# Allegro board pc049a_toplevel_28.brd
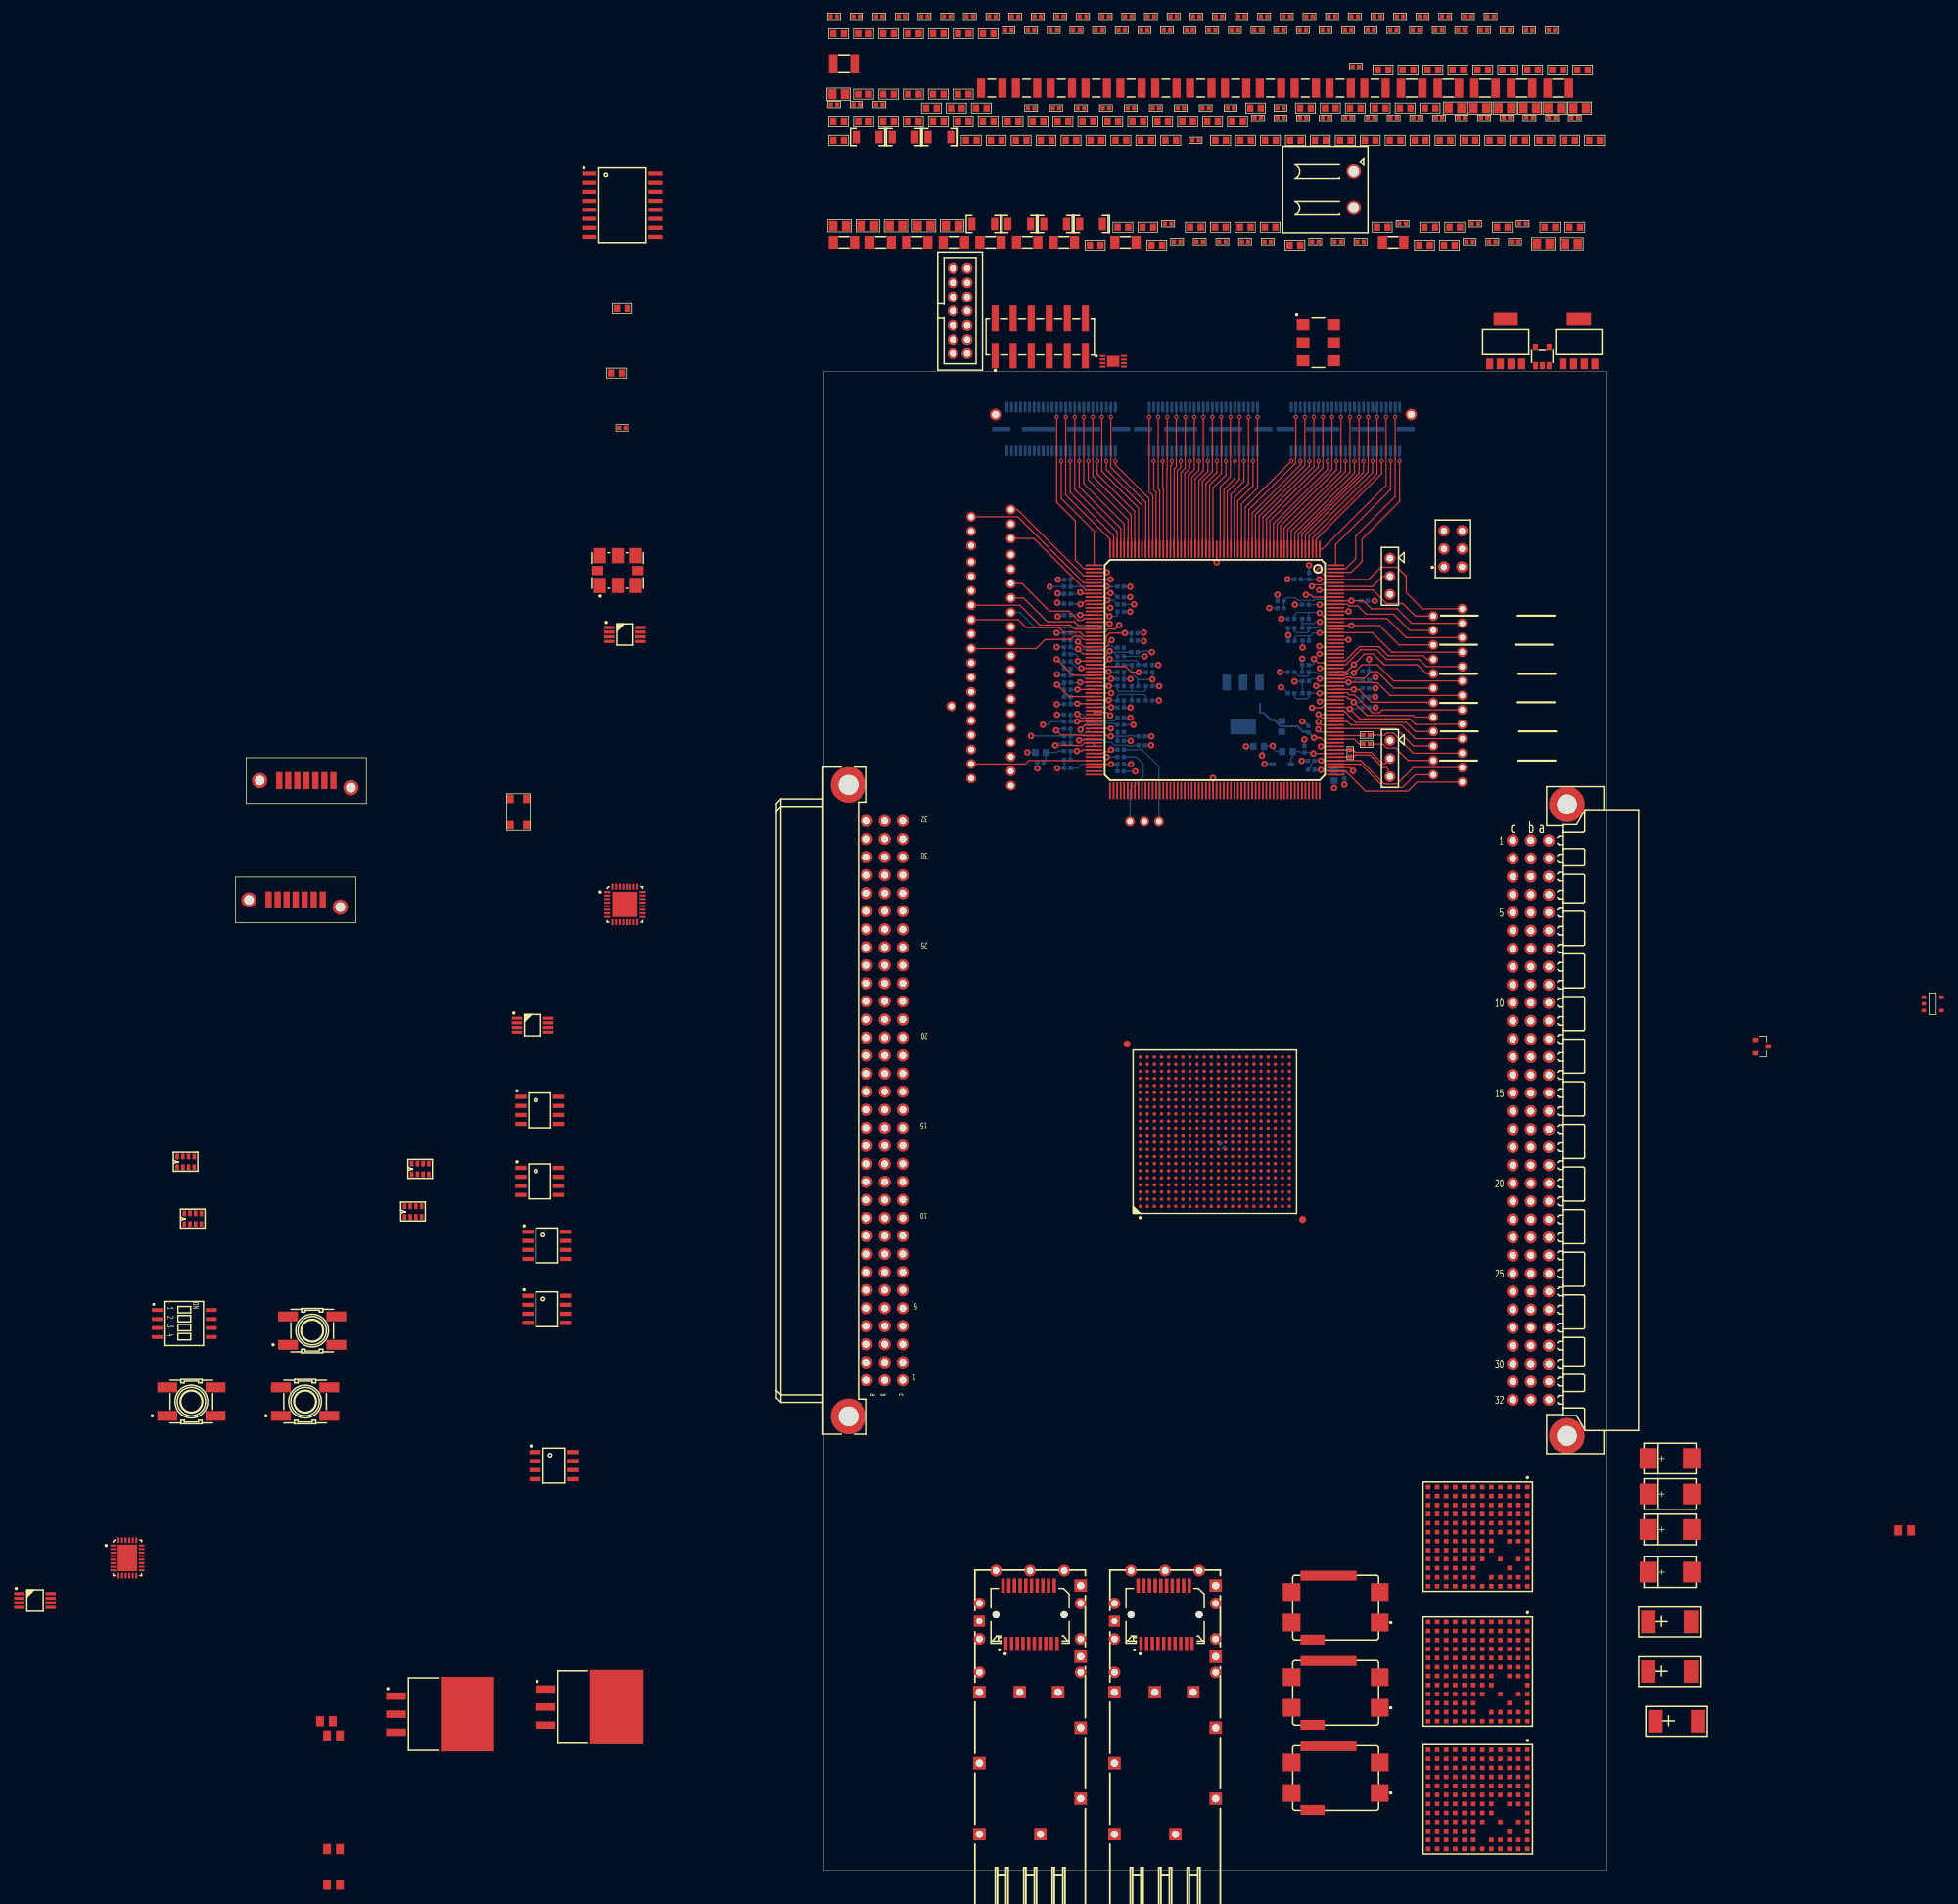
[diagram p0: board, top side]
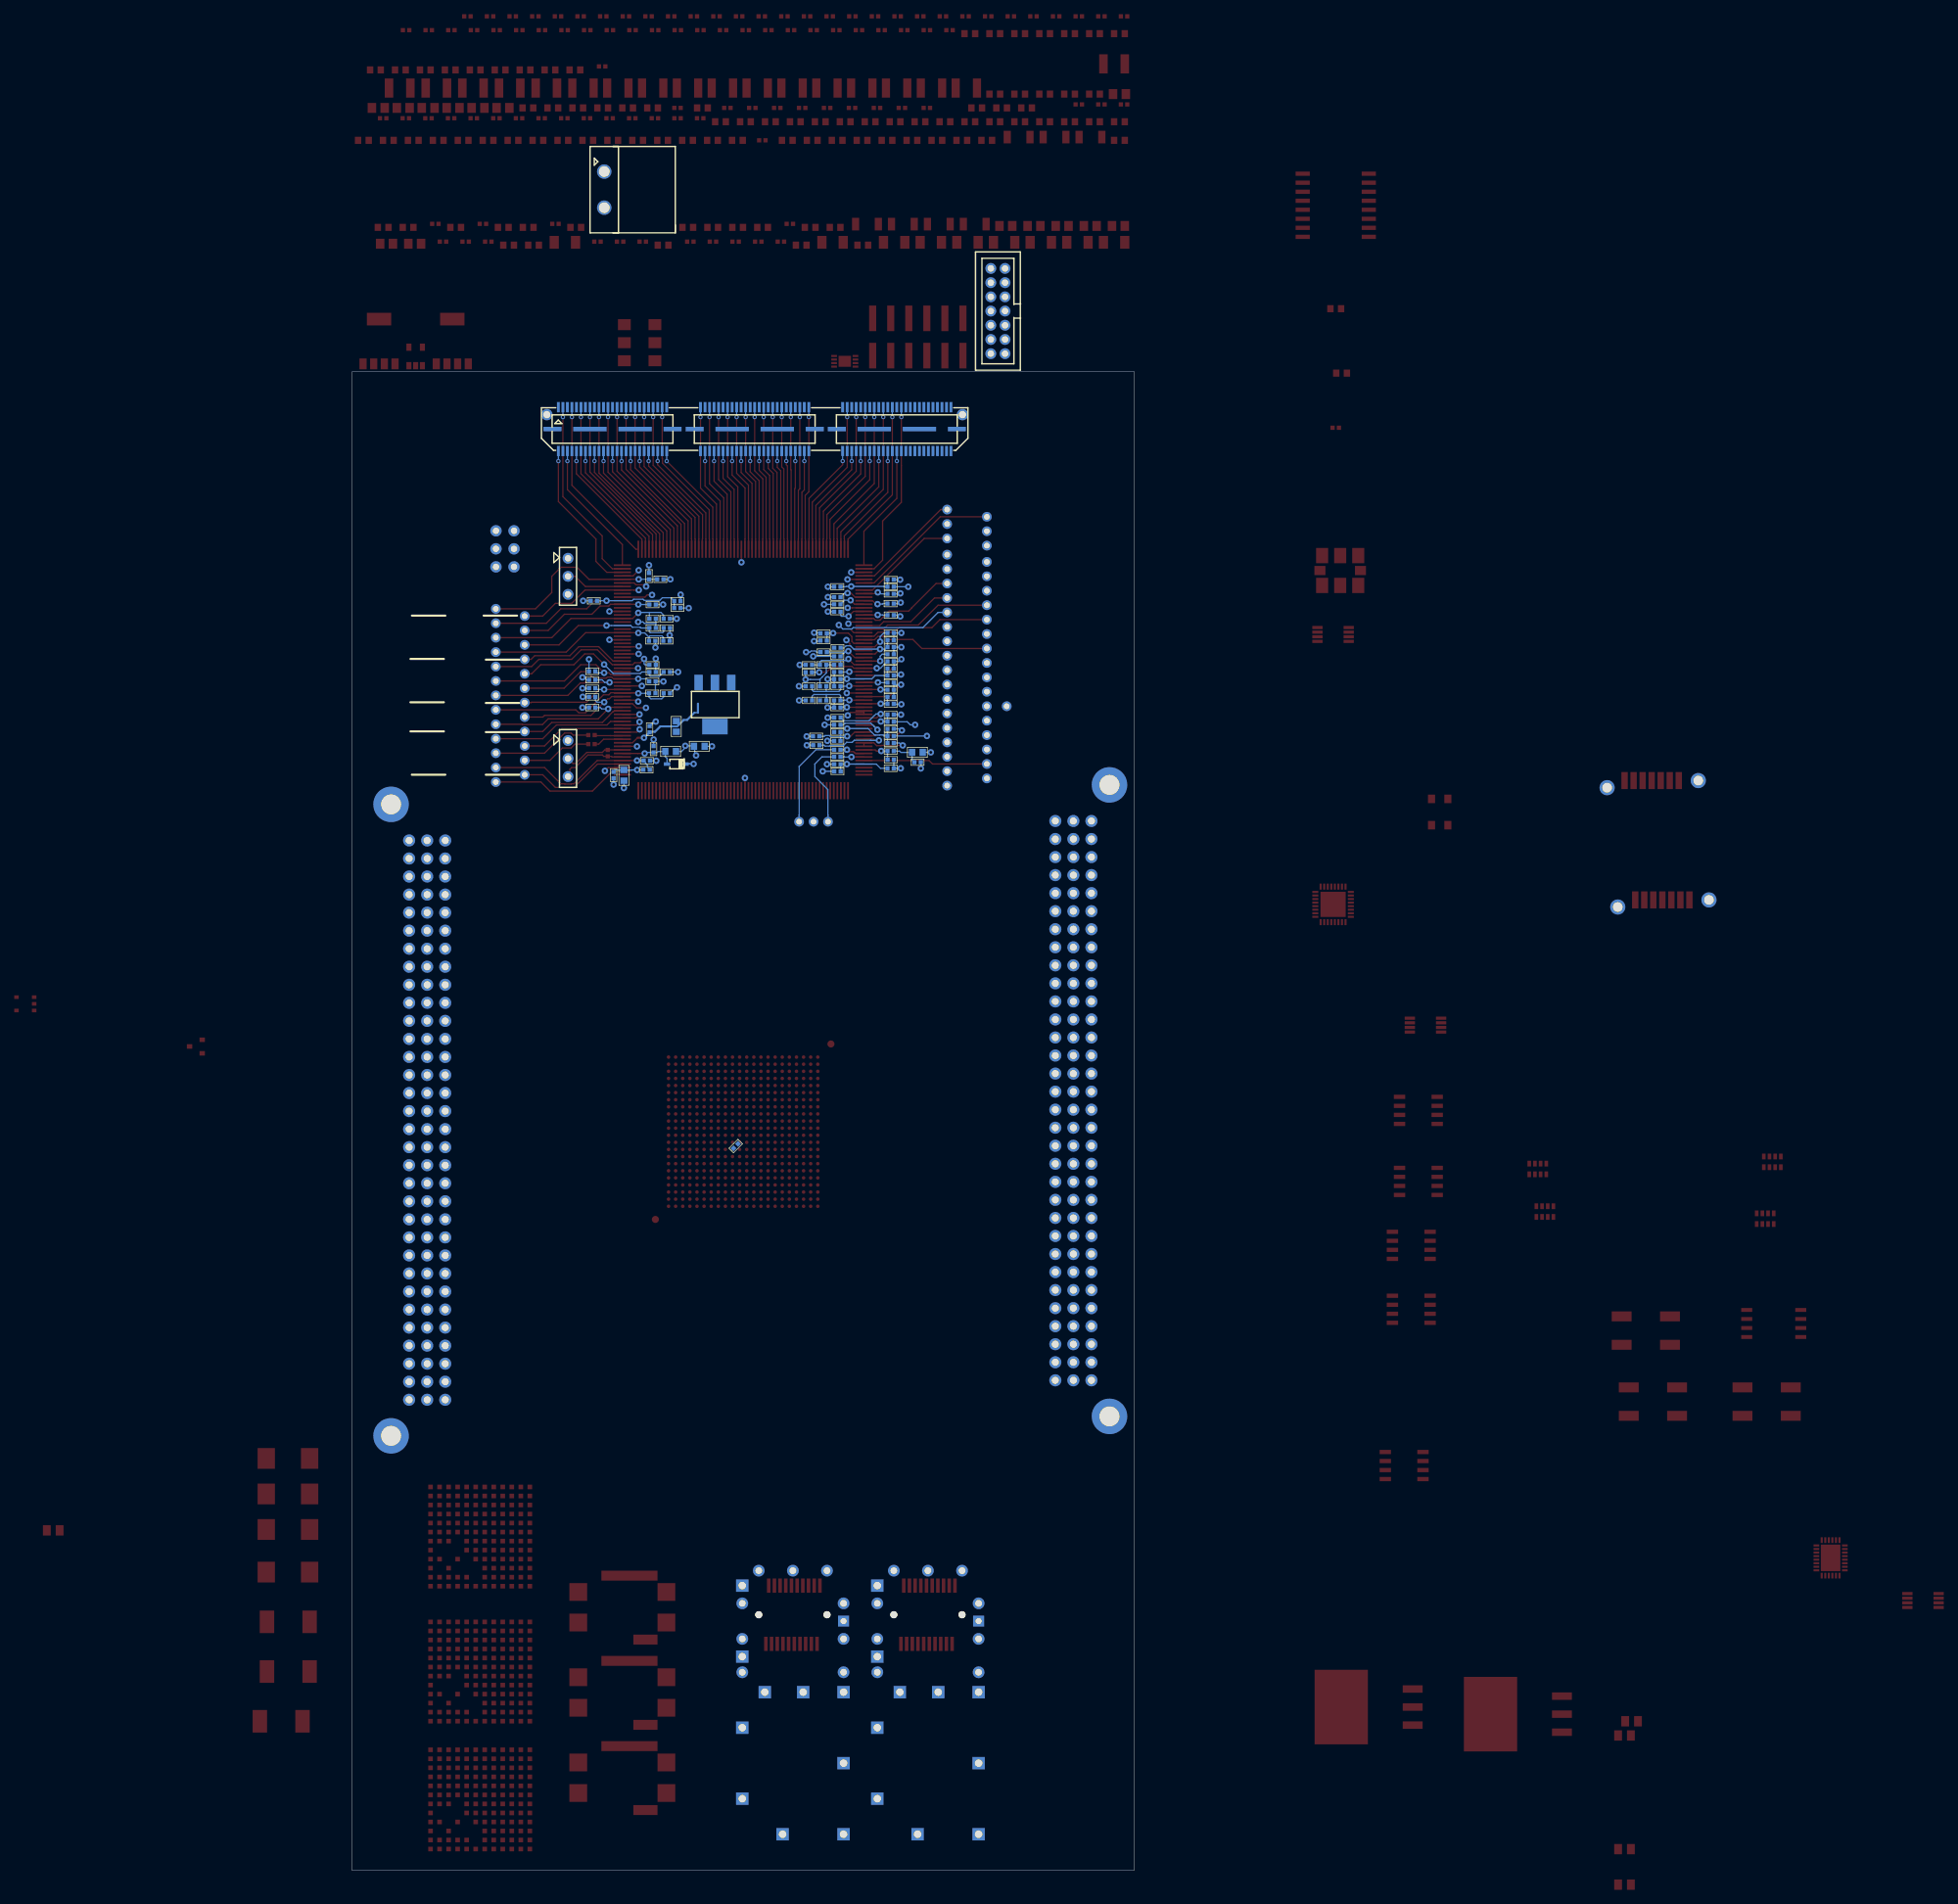
[diagram p1: board, bottom side, seen from below]

Outline 110 x 211 mm; copper layers: TOP, L2, L3, L4, L5, BOTTOM. Coordinates in mm from the lower left corner of the outline.
Outline path: 0,211 110,211 110,0 0,0 0,211

## Design rules (mm)
net group OR: nets OR<0> OR<1>
net group SATA_RXN: nets SATA_MRX_N SATA_SRX_N
net group SATA_RXP: nets SATA_MRX_P SATA_SRX_P
net group SATA_TXN: nets SATA_MTX_N SATA_STX_N
net group SATA_TXP: nets SATA_MTX_P SATA_STX_P
net group SFP_LOS: nets SFP0_LOS SFP1_LOS
net group SFP_MOD_DEF0: nets SFP0_MOD_DEF0 SFP1_MOD_DEF0
net group SFP_MOD_DEF1: nets SFP0_MOD_DEF1 SFP1_MOD_DEF1
net group SFP_MODE_DEF2: nets SFP0_MOD_DEF2 SFP1_MOD_DEF2
net group SFP_RATE_SELECT: nets SFP0_RATE_SELECT SFP1_RATE_SELECT
net group SFP_RXN: nets SFP0_RX_N SFP1_RX_N
net group SFP_RXP: nets SFP0_RX_P SFP1_RX_P
net group SFP_TX_DISABLE: nets SFP0_TX_DISABLE SFP1_TX_DISABLE
net group SFP_TX_FAULT: nets SFP0_TX_FAULT SFP1_TX_FAULT
net group SFP_TXN: nets SFP0_TX_N SFP1_TX_N
net group SFP_TXP: nets SFP0_TX_P SFP1_TX_P
net group ANALOG_TO_MAROC: nets ANALOG_TO_MAROC<0> ANALOG_TO_MAROC<1> ANALOG_TO_MAROC<2> ANALOG_TO_MAROC<3> ANALOG_TO_MAROC<4> ANALOG_TO_MAROC<5> ANALOG_TO_MAROC<6> ANALOG_TO_MAROC<7> ANALOG_TO_MAROC<8> ANALOG_TO_MAROC<9> ANALOG_TO_MAROC<10> ANALOG_TO_MAROC<11> ANALOG_TO_MAROC<12> ANALOG_TO_MAROC<13> ANALOG_TO_MAROC<14> ANALOG_TO_MAROC<15> ANALOG_TO_MAROC<16> ANALOG_TO_MAROC<17> ANALOG_TO_MAROC<18> ANALOG_TO_MAROC<19> ANALOG_TO_MAROC<20> ANALOG_TO_MAROC<21> ANALOG_TO_MAROC<22> ANALOG_TO_MAROC<23> ANALOG_TO_MAROC<24> ANALOG_TO_MAROC<25> ANALOG_TO_MAROC<26> ANALOG_TO_MAROC<27> ANALOG_TO_MAROC<28> ANALOG_TO_MAROC<29> ANALOG_TO_MAROC<30> ANALOG_TO_MAROC<31> ANALOG_TO_MAROC<32> ANALOG_TO_MAROC<33> ANALOG_TO_MAROC<34> ANALOG_TO_MAROC<35> ANALOG_TO_MAROC<36> ANALOG_TO_MAROC<37> ANALOG_TO_MAROC<38> ANALOG_TO_MAROC<39> ANALOG_TO_MAROC<40> ANALOG_TO_MAROC<41> ANALOG_TO_MAROC<42> ANALOG_TO_MAROC<43> ANALOG_TO_MAROC<44> ANALOG_TO_MAROC<45> ANALOG_TO_MAROC<46> ANALOG_TO_MAROC<47> ANALOG_TO_MAROC<48> ANALOG_TO_MAROC<49> ANALOG_TO_MAROC<50> ANALOG_TO_MAROC<51> ANALOG_TO_MAROC<52> ANALOG_TO_MAROC<53> ANALOG_TO_MAROC<54> ANALOG_TO_MAROC<55> ANALOG_TO_MAROC<56> ANALOG_TO_MAROC<57> ANALOG_TO_MAROC<58> ANALOG_TO_MAROC<59> ANALOG_TO_MAROC<60> ANALOG_TO_MAROC<61> ANALOG_TO_MAROC<62> ANALOG_TO_MAROC<63>
net group DIG_CTEST: nets DIG_CTEST<0> DIG_CTEST<1> DIG_CTEST<2> DIG_CTEST<3> DIG_CTEST<4> DIG_CTEST<5>
net group DIP_SWITCH: nets DIP_SWITCH<0> DIP_SWITCH<1> DIP_SWITCH<2> DIP_SWITCH<3>
net group FPGA_GPIO: nets FPGA_GPIO<0> FPGA_GPIO<1> FPGA_GPIO<2> FPGA_GPIO<3> FPGA_GPIO<4> FPGA_GPIO<5> FPGA_GPIO<6> FPGA_GPIO<7>
net group FPGA_LEDS: nets FPGA_LEDS<0> FPGA_LEDS<1> FPGA_LEDS<2> FPGA_LEDS<3> FPGA_LEDS<4>
net group LVDS_DLEFT_N: nets LVDS_DLEFT_N<0> LVDS_DLEFT_N<1> LVDS_DLEFT_N<2> LVDS_DLEFT_N<3> LVDS_DLEFT_N<4> LVDS_DLEFT_N<5> LVDS_DLEFT_N<6> LVDS_DLEFT_N<7> LVDS_DLEFT_N<8> LVDS_DLEFT_N<9> LVDS_DLEFT_N<10> LVDS_DLEFT_N<11> LVDS_DLEFT_N<12> LVDS_DLEFT_N<13> LVDS_DLEFT_N<14> LVDS_DLEFT_N<15>
net group LVDS_DLEFT_P: nets LVDS_DLEFT_P<0> LVDS_DLEFT_P<1> LVDS_DLEFT_P<2> LVDS_DLEFT_P<3> LVDS_DLEFT_P<4> LVDS_DLEFT_P<5> LVDS_DLEFT_P<6> LVDS_DLEFT_P<7> LVDS_DLEFT_P<8> LVDS_DLEFT_P<9> LVDS_DLEFT_P<10> LVDS_DLEFT_P<11> LVDS_DLEFT_P<12> LVDS_DLEFT_P<13> LVDS_DLEFT_P<14> LVDS_DLEFT_P<15>
net group LVDS_DRIGHT_N: nets LVDS_DRIGHT_N<0> LVDS_DRIGHT_N<1> LVDS_DRIGHT_N<2> LVDS_DRIGHT_N<3> LVDS_DRIGHT_N<4> LVDS_DRIGHT_N<5> LVDS_DRIGHT_N<6> LVDS_DRIGHT_N<7> LVDS_DRIGHT_N<8> LVDS_DRIGHT_N<9> LVDS_DRIGHT_N<10> LVDS_DRIGHT_N<11> LVDS_DRIGHT_N<12> LVDS_DRIGHT_N<13> LVDS_DRIGHT_N<14> LVDS_DRIGHT_N<15>
net group LVDS_DRIGHT_P: nets LVDS_DRIGHT_P<0> LVDS_DRIGHT_P<1> LVDS_DRIGHT_P<2> LVDS_DRIGHT_P<3> LVDS_DRIGHT_P<4> LVDS_DRIGHT_P<5> LVDS_DRIGHT_P<6> LVDS_DRIGHT_P<7> LVDS_DRIGHT_P<8> LVDS_DRIGHT_P<9> LVDS_DRIGHT_P<10> LVDS_DRIGHT_P<11> LVDS_DRIGHT_P<12> LVDS_DRIGHT_P<13> LVDS_DRIGHT_P<14> LVDS_DRIGHT_P<15>
net group SUM: nets SUM<1>_1 SUM<2>_1 SUM<3>_1 SUM<4>_1 SUM<5>_1 SUM<6>_1 SUM<7>_1 SUM<8>_1
net group TRIG: nets TRIG<0> TRIG<1> TRIG<2> TRIG<3> TRIG<4> TRIG<5> TRIG<6> TRIG<7> TRIG<8> TRIG<9> TRIG<10> TRIG<11> TRIG<12> TRIG<13> TRIG<14> TRIG<15> TRIG<16> TRIG<17> TRIG<18> TRIG<19> TRIG<20> TRIG<21> TRIG<22> TRIG<23> TRIG<24> TRIG<25> TRIG<26> TRIG<27> TRIG<28> TRIG<29> TRIG<30> TRIG<31> TRIG<32> TRIG<33> TRIG<34> TRIG<35> TRIG<36> TRIG<37> TRIG<38> TRIG<39> TRIG<40> TRIG<41> TRIG<42> TRIG<43> TRIG<44> TRIG<45> TRIG<46> TRIG<47> TRIG<48> TRIG<49> TRIG<50> TRIG<51> TRIG<52> TRIG<53> TRIG<54> TRIG<55> TRIG<56> TRIG<57> TRIG<58> TRIG<59> TRIG<60> TRIG<61> TRIG<62> TRIG<63>
net group UNNAMED_4_CDCM61004_I8_VCCOUT: nets P3V3A
net group UNNAMED_9_CAPCERSMDCL2_I82_B: nets UNNAMED_9_CAPCERSMDCL2_I82_B<0>
net group UNNAMED_9_LTM4606_I4_VOUT: nets P1V5
net group UNNAMED_9_LTM4606_I72_DRVCC: nets UNNAMED_9_LTM4606_I72_DRVCC<0>
net group UNNAMED_9_LTM4606_I72_VOUT: nets P3V8
net group UNNAMED_10_PC049AFPGA_I1_GND: nets GND_SIGNAL
net group UNNAMED_10_PC049AFPGA_I1_VCCAUX: nets P2V5
net group UNNAMED_10_PC049AFPGA_I1_VCCINT: nets P1V2
net group UNNAMED_10_PC049AFPGA_I1_VCCO3: nets P3V3
net group UNNAMED_11_CAPCERSMDCL2_I82_B: nets UNNAMED_11_CAPCERSMDCL2_I82_<0>
net group UNNAMED_11_LTM4606_I72_DRVCC: nets UNNAMED_11_LTM4606_I72_DRVCC<0>
net group UNNAMED_11_LTM4606_I72_PGND: nets DGND
net group UNNAMED_11_LTM4606_I72_VIN: nets P12V
net group UNNAMED_11_LTM4606_I72_VOUT: nets P4V6

## Placement (name value [footprint] x y rotation side)
C1  100nF  [C0402]  36.17 248.13 0 top
C1_1  100nF  [C0402]  68.56 156.22 180 bottom
C2  100nF  [C0402]  39.68 248.13 0 top
C2_1  100nF  [C0402]  34.24 156.37 0 bottom
C3  1uF  [C0402]  52.3 243.56 0 top
C3_1  100nF  [C0402]  43.67 171.51 180 bottom
C4  100nF  [C0402]  43.19 248.13 0 top
C4_1  100nF  [C0402]  68.25 182.21 270 bottom
C5  100nF  [C0402]  46.7 248.13 0 top
C5_1  100nF  [C0402]  67.75 176.21 0 bottom
C6  100nF  [C0402]  50.21 248.13 0 top
C6_1  100nF  [C0402]  34.25 181.71 0 bottom
C7  100nF  [C0402]  53.71 248.13 0 top
C7_1  100nF  [C0402]  67.75 174.91 0 bottom
C8  100nF  [C0402]  57.22 248.13 0 top
C8_1  100nF  [C0402]  34.25 180.71 0 bottom
C9  1uF  [C0402]  99.28 246.67 0 top
C9_1  100nF  [C0402]  43.68 173.13 180 bottom
C10  1uF  [C0402]  102.46 246.67 0 top
C10_1  100nF  [C0402]  67.8 173.1 0 bottom
C11  100nF  [C0402]  68.31 261.02 0 top
C11_1  100nF  [C0402]  34.25 165.21 0 bottom
C12  1uF  [C0402]  105.65 246.67 0 top
C12_1  100nF  [C0402]  67.75 168.71 0 bottom
C13  22uF  [C0603]  5.57 250.07 0 top
C13_1  100nF  [C0402]  34.25 170.21 0 bottom
C14  100nF  [C0402]  61.05 246.67 0 top
C14_1  100nF  [C0402]  34.25 162.71 0 bottom
C15  100nF  [C0402]  64.23 246.67 0 top
C15_1  100nF  [C0402]  34.25 160.71 0 bottom
C16  100nF  [C0402]  67.42 246.67 0 top
C16_1  100nF  [C0402]  67.79 165.72 0 bottom
C17  100nF  [C0402]  70.61 246.67 0 top
C17_1  100nF  [C0402]  34.25 158.71 0 bottom
C18  100nF  [C0402]  73.79 246.67 0 top
C18_1  100nF  [C0402]  34.25 179.71 0 bottom
C19  100nF  [C0402]  76.98 246.67 0 top
C19_1  100nF  [C0402]  41.75 164.71 180 bottom
C20  100nF  [C0402]  80.16 246.67 0 top
C20_1  100nF  [C0402]  34.25 176.71 0 bottom
C21  100nF  [C0402]  83.35 246.67 0 top
C21_1  100nF  [C0402]  41.75 166.71 180 bottom
C22  100nF  [C0402]  71.5 261.02 0 top
C22_1  100nF  [C0402]  34.25 171.21 0 bottom
C23  22uF  [C0603]  9.07 250.07 0 top
C23_1  100nF  [C0402]  67.77 167.39 0 bottom
C24  1uF  [C0402]  1.41 248.62 0 top
C24_1  100nF  [C0402]  34.25 173.21 0 bottom
C25  1uF  [C0402]  4.59 248.62 0 top
C25_1  100nF  [C0402]  76.25 163.71 180 bottom
C26  100nF  [C0402]  74.68 261.02 0 top
C26_1  100nF  [C0402]  34.25 166.21 0 bottom
C27  1uF  [C0402]  7.78 248.62 0 top
C27_1  100nF  [C0402]  41.75 168.71 180 bottom
C28  22uF  [C0603]  12.58 250.07 0 top
C28_1  100nF  [C0402]  41.75 177.21 180 bottom
C29  100nF  [C0402]  77.87 261.02 0 top
C29_1  100nF  [C0402]  41.75 169.71 0 bottom
C30  22uF  [C0603]  16.09 250.07 0 top
C30_1  100nF  [C0402]  41.75 161.27 180 bottom
C31  100nF  [C0603]  60.73 248.13 0 top
C31_1  100nF  [C0402]  76.25 168.81 180 bottom
C32  150uF  [C7343POL]  117 21 0 top
C32_1  100nF  [C0402]  41.75 179.26 180 bottom
C33  10uF  [CAPC3225X279N]  23.6 250.92 0 top
C33_1  100nF  [C0402]  41.75 167.71 180 bottom
C34  XX  [C0603]  31.25 243.56 0 top
C34_1  100nF  [C0402]  44.73 159.65 180 bottom
C35  10uF  [CAPC3225X279N]  28.51 250.92 0 top
C35_1  100nF  [C0402]  67.75 169.71 0 bottom
C36  10uF  [CAPC3225X279N]  33.41 250.92 0 top
C36_1  100nF  [C0402]  41.76 178.23 180 bottom
C37  10uF  [CAPC3225X279N]  38.31 250.92 0 top
C37_1  100nF  [C0402]  76.25 165.21 180 bottom
C38  47uF  [C1210]  82.7 250.92 0 top
C38_1  100nF  [C0402]  76.02 178.74 180 bottom
C39  47uF  [C1210]  87.85 250.92 0 top
C39_1  100nF  [C0402]  34.26 178.34 0 bottom
C40  220uF  [POSCAP_D3]  116 42 0 top
C40_1  100nF  [C0402]  34.25 174.21 0 bottom
C41  2.2uF  [C0603]  71.25 248.13 0 top
C41_1  100nF  [C0402]  41.75 163.71 180 bottom
C42  2.2uF  [C0603]  81.78 248.13 0 top
C42_1  100nF  [C0402]  76.24 167.6 180 bottom
C43  22uF  [C0805]  2.21 231.51 0 top
C43_1  100nF  [C0402]  67.75 178.21 0 bottom
C44  1nF  [C0402]  89.72 246.67 0 top
C44_1  100nF  [C0402]  41.74 155.74 180 bottom
C45  100nF  [C0402]  86.53 246.67 0 top
C45_1  100nF  [C0402]  41.74 162.29 180 bottom
C46  2.2uF  [C0603]  85.29 248.13 0 top
C46_1  100nF  [C0402]  76.24 166.42 180 bottom
C47  4.7uF  [C0603]  19.6 250.07 0 top
C47_1  100nF  [C0402]  34.25 167.21 0 bottom
C48  10uF  [C0603]  67.75 248.13 0 top
C48_1  10uF  [C0603]  64.41 161.05 90 bottom
C50  100nF  [C0402]  26.89 261.02 0 top
C50_1  100nF  [C0402]  67.61 157.84 270 bottom
C51  22uF  [C0805]  88.8 248.13 0 top
C51_1  100nF  [C0402]  68.17 160.66 270 bottom
C52  22uF  [C0805]  92.3 248.13 0 top
C52_1  10uF  [C0603]  71.78 154.17 90 bottom
C53  22uF  [C0805]  95.81 248.13 0 top
C53_1  10uF  [C0603]  30.49 157.4 0 bottom
C54  22uF  [C0805]  99.32 248.13 0 top
C54_1  10uF  [C0603]  61.17 158.25 0 bottom
C55  22uF  [C0805]  102.83 248.13 0 top
C56  100nF  [C0402]  30.08 261.02 0 top
C57  100nF  [C0402]  33.27 261.02 0 top
C58  100nF  [C0402]  36.45 261.02 0 top
C59  1uF  [C0402]  92.91 246.67 0 top
C60  100nF  [C0402]  29.16 248.13 0 top
C61  100nF  [C0402]  32.66 248.13 0 top
C62  100nF  [C0402]  39.64 261.02 0 top
C63  100nF  [C0402]  42.82 261.02 0 top
C64  100nF  [C0402]  46.01 261.02 0 top
C65  22uF  [C0805]  106.34 248.13 0 top
C66  100nF  [C0402]  49.2 261.02 0 top
C67  22uF  [C0805]  2.06 250.07 0 top
C68  100nF  [C0402]  52.38 261.02 0 top
C69  100nF  [C0402]  55.57 261.02 0 top
C70  100nF  [C0402]  58.75 261.02 0 top
C71  1uF  [C0402]  96.09 246.67 0 top
C72  100nF  [C0402]  61.94 261.02 0 top
C73  100nF  [C0402]  65.12 261.02 0 top
C74  22uF  [C0805]  101.22 229.01 0 top
C75  150uF  [C7343POL]  116 35 0 top
C76  10uF  [CAPC3225X279N]  62.83 250.92 0 top
C77  100nF  [C0402]  64.24 248.13 0 top
C78  10uF  [CAPC3225X279N]  67.73 250.92 0 top
C79  10uF  [CAPC3225X279N]  72.63 250.92 0 top
C80  10uF  [CAPC3225X279N]  77.54 250.92 0 top
C81  47uF  [C1210]  103.33 250.92 0 top
C82  47uF  [C1210]  2.81 254.32 0 top
C83  220uF  [POSCAP_D3]  116 53 0 top
C84  2.2uF  [C0603]  78.27 248.13 0 top
C85  220uF  [POSCAP_D3]  116 58 0 top
C86  150uF  [C7343POL]  116 28 0 top
C87  10uF  [CAPC3225X279N]  43.22 250.92 0 top
C88  XX  [C0603]  34.76 243.56 0 top
C89  10uF  [CAPC3225X279N]  48.12 250.92 0 top
C90  10uF  [CAPC3225X279N]  53.02 250.92 0 top
C91  10uF  [CAPC3225X279N]  57.92 250.92 0 top
C92  47uF  [C1210]  93.01 250.92 0 top
C93  47uF  [C1210]  98.17 250.92 0 top
C94  220uF  [POSCAP_D3]  116 48 0 top
C95  2.2uF  [C0603]  74.76 248.13 0 top
C96  100uF  [C1206]  23.44 229.21 0 top
C97  100uF  [C1206]  18.28 229.21 0 top
C98  22uF  [C0805]  6.17 231.51 0 top
C99  22uF  [C0805]  105.17 229.01 0 top
C100  100nF  [C0603]  22.14 248.13 0 top
C103  100nF  [C0603]  18.63 248.13 0 top
C104  22uF  [C0805]  18.04 231.51 0 top
C105  100nF  [C0402]  1.41 261.02 0 top
C106  100nF  [C0402]  4.59 261.02 0 top
C107  1uF  [C0402]  94.05 229.3 0 top
C108  100nF  [C0402]  7.78 261.02 0 top
C109  100nF  [C0402]  10.97 261.02 0 top
C110  1uF  [C0402]  97.23 229.3 0 top
C111  100nF  [C0402]  14.15 261.02 0 top
C112  100nF  [C0402]  17.34 261.02 0 top
C113  100nF  [C0402]  20.52 261.02 0 top
C114  100nF  [C0402]  23.71 261.02 0 top
C115  100uF  [C1206]  80.08 229.21 0 top
C116  100uF  [C1206]  42.42 229.21 0 top
C117  4.7uF  [C0402]  75.5 229.3 0 top
C118  4.7uF  [C0402]  48.43 231.8 0 top
C119  4.7uF  [C0402]  81.41 231.8 0 top
C120  100nF  [C0402]  89.68 259.07 0 top
C121  100nF  [C0402]  92.87 259.07 0 top
C122  100nF  [C0402]  96.05 259.07 0 top
C123  100nF  [C0402]  99.24 259.07 0 top
C124  100nF  [C0402]  102.42 259.07 0 top
C125  100nF  [C0402]  56.05 101.98 315 bottom
C126  100uF  [C1206]  28.6 229.21 0 top
C127  4.7uF  [C0402]  49.69 229.3 0 top
C128  100nF  [C0402]  25.97 259.07 0 top
C129  22uF  [C0805]  10.12 231.51 0 top
C130  100nF  [C0402]  29.15 259.07 0 top
C131  100nF  [C0402]  32.34 259.07 0 top
C132  100nF  [C0402]  35.52 259.07 0 top
C133  100uF  [C1206]  33.76 229.21 0 top
C134  100nF  [C0402]  38.71 259.07 0 top
C135  22uF  [C0805]  14.08 231.51 0 top
C136  100uF  [C1206]  2.81 229.21 0 top
C137  100nF  [C0402]  41.89 259.07 0 top
C138  4.7uF  [C0402]  52.88 229.3 0 top
C139  100uF  [C1206]  7.97 229.21 0 top
C140  100nF  [C0402]  45.08 259.07 0 top
C141  100nF  [C0402]  48.27 259.07 0 top
C142  100uF  [C1206]  13.12 229.21 0 top
C143  100nF  [C0402]  51.45 259.07 0 top
C144  100nF  [C0402]  54.64 259.07 0 top
C145  4.7uF  [C0402]  56.06 229.3 0 top
C146  100nF  [C0402]  57.82 259.07 0 top
C147  100nF  [C0402]  61.01 259.07 0 top
C148  4.7uF  [C0402]  59.25 229.3 0 top
C149  100nF  [C0402]  64.2 259.07 0 top
C150  100nF  [C0402]  67.38 259.07 0 top
C151  4.7uF  [C0402]  62.43 229.3 0 top
C152  100nF  [C0402]  70.57 259.07 0 top
C153  4.7uF  [C0402]  90.86 229.3 0 top
C154  100nF  [C0402]  73.75 259.07 0 top
C155  4.7uF  [C0402]  69.13 229.3 0 top
C156  100nF  [C0402]  76.94 259.07 0 top
C157  4.7uF  [C0402]  72.31 229.3 0 top
C158  100nF  [C0402]  80.12 259.07 0 top
C159  100nF  [C0402]  83.31 259.07 0 top
C160  100nF  [C0402]  86.5 259.07 0 top
C161  220pF  [C0603]  88.76 231.31 0 top
C162  56pF  [C0603]  88 228.81 0 top
C163  100pF  [C0603]  58.19 246.18 0 top
C164  100pF  [C0603]  108.43 243.56 0 top
C165  100pF  [C0603]  97.91 243.56 0 top
D1_1  -  [SOD323_INV]  64.41 155.75 180 bottom
IC1  -  [SOP65P490X95-8N]  -28 174 0 top
IC2  -  [SOIC127P600X175-8N]  -39 88 0 top
IC3  -  [SOIC127P600X175-8N]  -39 79 0 top
IC4  -  [LGA133S127P12X12_05-08-1766]  92 28 270 top
IC5  -  [SOIC127P600X175-8N]  -40 97 0 top
IC6  -  [SOIC127P600X175-8N]  -40 107 0 top
IC7  -  [SOIC127P600X175-8N]  -38 57 0 top
IC9  -  [SOP65P490X95-8N]  -41 119 0 top
IC10  -  [LGA133S127P12X12_05-08-1766]  92 10 270 top
IC11  -  [QFN50P500X500X100-33N-S355]  -28 136 0 top
IC13  -  [SOP65P490X110-8N]  -111 38 0 top
IC14  -  [LGA133S127P12X12_05-08-1766]  92 47 270 top
IC15  -  [SON50P300X200X100-9N-R175X155]  40.7 212.45 0 top
IC16  -  [SOT23_5]  100.13 211.84 0 top
IC20  -  [SOT223_5]  103.98 212.09 0 top
IC21  -  [SOT223_5]  93.68 212.09 0 top
IC22  -  [SOIC127P1030X265-16N]  -28.38 234.42 0 top
J1  -  [CON150_QTSDA]  81 206 90 bottom
J1_1  -  [SAMTEC_SSW-103-01-G-D]  88.51 186.05 270 top
J2  -  [HARTING_0903196X921]  102 145 0 top
J3  -  [HARTING_09732966801]  6 69 180 top
J3_1  -  [CONHE13D3X1M]  79.64 159.07 270 top
J4  -  [SK_SATA_SMD_STR]  -69.02 153.43 270 top
J4_1  -  [CONHE13D3X1M]  79.64 184.72 270 top
J5  -  [SK_SATA_SMD_STR]  -70.52 136.63 270 top
J6  -  [TYCO_1367073]  29 36 90 top
J7  -  [TYCO_1367073]  48 36 90 top
J8  -  [CON14MD_2MM]  18.16 225.53 0 top
J9  -  [CON2MC_508]  74.55 239.16 0 top
J10  -  [SAMTEC_TSM-106-01-X-DV]  32.97 215.88 0 top
L1  -  [INDC2012X90N]  -69 19 0 top
L2  -  [INDC2012X90N]  -70 21 0 top
L3  -  [INDC2012X90N]  -69 3 0 top
L4  -  [INDC2012X90N]  -69 -2 0 top
L5  -  [C0603]  101.42 243.56 0 top
L6  -  [C0603]  104.93 243.56 0 top
L7  -  [C0603]  15.12 248.13 0 top
L8  -  [C0603]  2.06 246.18 0 top
L9  -  [INDC2012X90N]  152.07 47.87 0 top
LC1  -  [MURATA_BNX02]  72 13 180 top
LC2  -  [MURATA_BNX02]  72 25 180 top
LC3  -  [MURATA_BNX02]  72 37 180 top
LD1  Red  [D1206]  14.65 244.02 0 top
LD2  Red  [D1206]  4.54 244.02 0 top
LD3  Green  [D1206]  35.98 231.77 0 top
LD4  Yellow  [D1206]  30.93 231.77 0 top
LD5  Red  [D1206]  9.59 244.02 0 top
LD6  Yellow  [D1206]  25.87 231.77 0 top
LD7  Yellow  [D1206]  20.82 231.77 0 top
LK1_1  -  [1-HOLE_0-8P]  89.8 155.26 0 top
LK2_1  -  [1-HOLE_0-8P]  26.3 156.78 0 top
LK3_1  -  [1-HOLE_0-8P]  20.71 180.15 0 top
LK4_1  -  [1-HOLE_0-8P]  89.8 177.61 0 top
LK5_1  -  [1-HOLE_0-8P]  89.8 173.55 0 top
LK6_1  -  [1-HOLE_0-8P]  85.74 176.6 0 top
LK7_1  -  [1-HOLE_0-8P]  85.74 172.53 0 top
LK8_1  -  [1-HOLE_0-8P]  20.71 182.18 0 top
LK9_1  -  [1-HOLE_0-8P]  89.8 171.52 0 top
LK10_1  -  [1-HOLE_0-8P]  85.74 168.47 0 top
LK11_1  -  [1-HOLE_0-8P]  20.71 169.99 0 top
LK12_1  -  [1-HOLE_0-8P]  26.3 162.88 0 top
LK13_1  -  [1-HOLE_0-8P]  89.8 163.39 0 top
LK14_1  -  [1-HOLE_0-8P]  20.71 159.83 0 top
LK15_1  -  [1-HOLE_0-8P]  26.3 154.75 0 top
LK16_1  -  [1-HOLE_0-8P]  26.3 185.23 0 top
LK17_1  -  [1-HOLE_0-8P]  20.71 161.86 0 top
LK18_1  -  [1-HOLE_0-8P]  26.3 183.2 0 top
LK19_1  -  [1-HOLE_0-8P]  26.3 164.91 0 top
LK20_1  -  [1-HOLE_0-8P]  26.3 171.01 0 top
LK21_1  -  [1-HOLE_0-8P]  85.74 166.44 0 top
LK22_1  -  [1-HOLE_0-8P]  20.71 174.06 0 top
LK23_1  -  [1-HOLE_0-8P]  89.8 161.36 0 top
LK24_1  -  [1-HOLE_0-8P]  20.71 165.93 0 top
LK25_1  -  [1-HOLE_0-8P]  26.3 168.98 0 top
LK26_1  -  [1-HOLE_0-8P]  89.8 153.23 0 top
LK27_1  -  [1-HOLE_0-8P]  20.71 163.9 0 top
LK28_1  -  [1-HOLE_0-8P]  89.8 159.32 0 top
LK29_1  -  [1-HOLE_0-8P]  85.74 158.31 0 top
LK30_1  -  [1-HOLE_0-8P]  17.92 163.9 0 top
LK31_1  -  [1-HOLE_0-8P]  20.71 186.5 0 top
LK32_1  -  [1-HOLE_0-8P]  26.3 173.04 0 top
LK33_1  -  [1-HOLE_0-8P]  26.3 158.82 0 top
LK34_1  -  [1-HOLE_0-8P]  89.8 167.45 0 top
LK35_1  -  [1-HOLE_0-8P]  26.3 189.55 0 top
LK36_1  -  [1-HOLE_0-8P]  20.71 167.96 0 top
LK37_1  -  [1-HOLE_0-8P]  20.71 153.74 0 top
LK38_1  -  [1-HOLE_0-8P]  89.8 169.48 0 top
LK39_1  -  [1-HOLE_0-8P]  20.71 188.53 0 top
LK40_1  -  [1-HOLE_0-8P]  85.74 162.37 0 top
LK41_1  -  [1-HOLE_0-8P]  89.8 175.58 0 top
LK42_1  -  [1-HOLE_0-8P]  20.71 184.22 0 top
LK43_1  -  [1-HOLE_0-8P]  26.3 175.07 0 top
LK44_1  -  [1-HOLE_0-8P]  20.71 157.8 0 top
LK45_1  -  [1-HOLE_0-8P]  89.8 165.42 0 top
LK46_1  -  [1-HOLE_0-8P]  85.74 174.56 0 top
LK47_1  -  [1-HOLE_0-8P]  26.3 152.72 0 top
LK48_1  -  [1-HOLE_0-8P]  26.3 160.85 0 top
LK49_1  -  [1-HOLE_0-8P]  85.74 164.4 0 top
LK50_1  -  [1-HOLE_0-8P]  26.3 166.94 0 top
LK51_1  -  [1-HOLE_0-8P]  85.74 156.28 0 top
LK52_1  -  [1-HOLE_0-8P]  89.8 157.29 0 top
LK53_1  -  [1-HOLE_0-8P]  26.3 177.1 0 top
LK54_1  -  [1-HOLE_0-8P]  43.07 147.64 0 top
LK55_1  -  [1-HOLE_0-8P]  45.1 147.64 0 top
LK56_1  -  [1-HOLE_0-8P]  47.13 147.64 0 top
LK57_1  -  [1-HOLE_0-8P]  26.3 187.52 0 top
LK58_1  -  [1-HOLE_0-8P]  85.74 170.5 0 top
LK59_1  -  [1-HOLE_0-8P]  20.71 155.77 0 top
LK60_1  -  [1-HOLE_0-8P]  26.3 191.58 0 top
LK61_1  -  [1-HOLE_0-8P]  26.3 181.17 0 top
LK62_1  -  [1-HOLE_0-8P]  20.71 178.12 0 top
LK63_1  -  [1-HOLE_0-8P]  85.74 160.34 0 top
LK64_1  -  [1-HOLE_0-8P]  26.3 179.14 0 top
LK65_1  -  [1-HOLE_0-8P]  20.71 176.09 0 top
LK66_1  -  [1-HOLE_0-8P]  20.71 190.57 0 top
LK67_1  -  [1-HOLE_0-8P]  20.71 172.02 0 top
LK68_1  -  [1-HOLE_0-8P]  85.74 154.24 0 top
QZ1  -  [OSC_SILABS_SI570]  -29 183 0 top
QZ2  20.000MHz  [OSCSC254P490X696X180-6N]  69.57 215.07 0 top
R1  100  [C0402]  81.05 261.02 0 top
R1_1  51  [C0402]  76.34 158.56 0 top
R2  100  [C0402]  84.24 261.02 0 top
R2_1  51  [C0402]  76.34 159.83 0 top
R3  2.4k  [C0603]  80.37 243.56 0 top
R3_1  10  [C0402]  68.59 154.95 180 bottom
R4  51  [C0402]  90.61 261.02 0 top
R4_1  10  [C0402]  34.25 157.58 0 bottom
R5  51  [C0402]  93.8 261.02 0 top
R5_1  10  [C0402]  41.75 170.92 0 bottom
R6  100  [C0402]  87.42 261.02 0 top
R6_1  10  [C0402]  66.65 181.77 180 bottom
R7  4.7k  [C0603]  55.78 231.31 0 top
R7_1  10  [C0402]  65.75 176.21 180 bottom
R8  XX  [C0603]  2.06 258.58 0 top
R8_1  10  [C0402]  41.75 180.71 0 bottom
R9  XX  [C0603]  5.57 258.58 0 top
R9_1  10  [C0402]  65.74 174.91 180 bottom
R10  100k  [C0603]  89.2 253.47 0 top
R10_1  10  [C0402]  43.68 174.17 0 bottom
R11  9k  [C0603]  105.65 231.31 0 top
R11_1  10  [C0402]  65.79 173.1 180 bottom
R12  390k  [C0603]  99.72 253.47 0 top
R12_1  10  [C0402]  34.25 164.21 180 bottom
R13  47k  [C0402]  74.84 253.97 0 top
R13_1  10  [C0402]  65.75 168.71 180 bottom
R14  240  [C0603]  40.65 246.18 0 top
R14_1  100  [C0402]  45.77 168.68 0 bottom
R15  240  [C0603]  44.16 246.18 0 top
R15_1  10  [C0402]  34.25 161.71 180 bottom
R16  240  [C0603]  47.66 246.18 0 top
R16_1  10  [C0402]  34.25 159.71 180 bottom
R17  33  [C0603]  51.17 246.18 0 top
R17_1  100  [C0402]  65.75 165.71 180 bottom
R18  XX  [C0603]  16.09 246.18 0 top
R18_1  51  [C0402]  41.75 156.76 180 bottom
R19  XX  [C0603]  19.6 246.18 0 top
R19_1  51  [C0402]  41.75 157.77 180 bottom
R20  00  [C0603]  23.11 246.18 0 top
R20_1  XX  [C0402]  43.75 164.71 0 bottom
R21  00  [C0603]  26.62 246.18 0 top
R21_1  XX  [C0402]  45.75 164.71 180 bottom
R22  XX  [C0603]  30.12 246.18 0 top
R22_1  XX  [C0402]  43.75 166.71 0 bottom
R23  XX  [C0603]  33.63 246.18 0 top
R23_1  XX  [C0402]  45.75 166.71 180 bottom
R24  XX  [C0603]  37.14 246.18 0 top
R24_1  100  [C0402]  74.05 157.29 270 top
R25  2.4k  [C0603]  83.88 243.56 0 top
R25_1  XX  [C0402]  41.74 172.13 0 bottom
R26  1.2k  [C0603]  62.83 243.56 0 top
R26_1  XX  [C0402]  34.25 172.21 0 bottom
R27  2.4k  [C0603]  87.38 243.56 0 top
R27_1  1k  [C0402]  44.71 158.4 0 bottom
R28  1.2k  [C0603]  66.34 243.56 0 top
R28_1  XX  [C0402]  43.75 169.71 180 bottom
R29  2.4k  [C0603]  90.89 243.56 0 top
R29_1  XX  [C0402]  45.75 169.71 180 bottom
R30  1.2k  [C0603]  69.84 243.56 0 top
R30_1  XX  [C0402]  34.25 168.21 180 bottom
R31  2.4k  [C0603]  94.4 243.56 0 top
R31_1  XX  [C0402]  34.25 169.21 0 bottom
R32  1.2k  [C0603]  55.81 243.56 0 top
R32_1  XX  [C0402]  41.75 160.27 0 bottom
R33  2.4k  [C0603]  73.35 243.56 0 top
R33_1  XX  [C0402]  41.75 159.02 180 bottom
R34  1.2k  [C0603]  59.32 243.56 0 top
R34_1  XX  [C0402]  64.25 178.71 180 bottom
R35  2.4k  [C0603]  76.86 243.56 0 top
R35_1  XX  [C0402]  64.25 177.71 0 bottom
R36  XX  [C0603]  16.09 258.58 0 top
R36_1  XX  [C0402]  41.73 154.73 0 bottom
R37  XX  [C0603]  19.6 258.58 0 top
R37_1  XX  [C0402]  34.25 155.16 0 bottom
R38  100k  [C0603]  96.22 253.47 0 top
R39  40.2k  [C0603]  23.11 258.58 0 top
R40  390k  [C0603]  106.74 253.47 0 top
R41  XX  [C0603]  9.07 258.58 0 top
R42  XX  [C0603]  12.58 258.58 0 top
R42_1  82  [C0603]  65.21 157.52 180 bottom
R43  100k  [C0603]  92.71 253.47 0 top
R44  11k  [C0603]  38.27 243.56 0 top
R45  390k  [C0603]  103.23 253.47 0 top
R46  120  [C0603]  45.29 243.56 0 top
R46_1  3.3  [C0402]  73.23 154.2 90 bottom
R47  120  [C0603]  48.79 243.56 0 top
R47_1  3.3  [C0402]  30.46 156.02 0 bottom
R48  4.7k  [C0603]  2.06 243.56 0 top
R49  51k  [C0603]  84.49 228.81 0 top
R50  180  [C0603]  27.75 243.56 0 top
R51  120  [C0603]  41.78 243.56 0 top
R52  150  [C0603]  24.24 243.56 0 top
R53  51  [C0603]  102.14 231.31 0 top
R54  00  [C0603]  9.07 246.18 0 top
R55  00  [C0603]  12.58 246.18 0 top
R56  4.7k  [C0603]  59.28 231.31 0 top
R57  4.7k  [C0603]  62.79 231.31 0 top
R58  4.7k  [C0603]  54.68 246.18 0 top
R59  4.7k  [C0603]  78.55 231.31 0 top
R60  4.7k  [C0603]  5.57 246.18 0 top
R61  330  [C0603]  45.57 231.31 0 top
R62  4.7k  [C0603]  85.25 231.31 0 top
R63  2.4k  [C0603]  42.07 231.31 0 top
R64  00  [C0402]  91.61 231.8 0 top
R65  00  [C0402]  98.31 231.8 0 top
R66  16k  [C0603]  38.17 228.81 0 top
R67  4.7k  [C0603]  52.27 231.31 0 top
R68  33k  [C0603]  66.27 228.81 0 top
R69  62k  [C0603]  46.83 228.81 0 top
R70  150  [C0603]  20.73 243.56 0 top
R71  3.3k  [C0603]  95.45 231.31 0 top
R72  100k  [C0603]  78.67 253.47 0 top
R73  100k  [C0603]  82.18 253.47 0 top
R74  100k  [C0603]  85.69 253.47 0 top
R75  100  [C0603]  -28.38 219.86 0 top
R76  100  [C0603]  -29.19 210.79 0 top
R77  33  [C0402]  -28.38 203.1 0 top
REG1  -  [TO254P1435X460-4N]  -33 23 0 top
REG3  -  [TO254P1435X460-4N]  -54 22 0 top
RG1  -  [QFN50P400X500X80-29N-R375X275]  -98 44 0 top
RG1_1  -  [SOT223_4]  56.67 167.23 0 bottom
RN1  150  [ARC241_SO8]  -59 92 0 top
RN2  150  [ARC241_SO8]  -58 98 0 top
RZ1  150  [ARC241_SO8]  -90 91 0 top
RZ2  4.7k  [ARC241_SO8]  -91 99 0 top
SFP1  -  [TYCO_6367034-1]  48 36 90 top
SFP2  -  [TYCO_6367035-1]  48 36 90 top
SFP3  -  [TYCO_6367034-1]  29 36 90 top
SFP4  -  [TYCO_6367035-1]  29 36 90 top
SW1  -  [OMRON_B3SN-3012]  -89 66 0 top
SW2  -  [OMRON_B3SN-3012]  -73 66 0 top
SW3  -  [SW_TYCO_1571983-4]  -90 77 0 top
SW4  -  [OMRON_B3SN-3012]  -72 76 0 top
U1  -  [OSC_4PIN_53S]  -43 149 0 top
U1_1  -  [PQFP240_050]  69.75 185.99 270 top
U2  -  [SOT23-5]  156 122 0 top
U3  -  [BGA484C100P22X22_2300X2300X260]  55 104 90 top
Z1  -  [SOT23]  132 116 0 top

## Library data of the parts
C1 C1_1 C2 C2_1 C3_1 C4 C4_1 C5 C5_1 C6 C6_1 C7 C7_1 C8 C8_1 C9_1 C10_1 C11 C11_1 C12_1 C13_1 C14 C14_1 C15 C15_1 C16 C16_1 C17 C17_1 C18 C18_1 C19 C19_1 C20 C20_1 C21 C21_1 C22 C22_1 C23_1 C24_1 C25_1 C26 C26_1 C27_1 C28_1 C29 C29_1 C30_1 C31_1 C32_1 C33_1 C34_1 C35_1 C36_1 C37_1 C38_1 C39_1 C40_1 C41_1 C42_1 C43_1 C44_1 C45 C45_1 C46_1 C47_1 C50 C50_1 C51_1 C56-C58 C60-C64 C66 C68-C70 C72 C73 C77 C105 C106 C108 C109 C111-C114 C120-C125 C128 C130-C132 C134 C137 C140 C141 C143 C144 C146 C147 C149 C150 C152 C154 C156 C158-C160 = CAPCERSMDCL2: part number: CAPCERSMDCL2_0402-100NF,16V_GEN; tolerance: 10%
C3 C9 C10 C12 C24 C25 C27 C59 C71 C107 C110 = CAPCERSMDCL2: part number: CAPCERSMDCL2_0402-1UF,16V; tolerance: 10%
C13 C23 C28 C30 = CAPCERSMDCL2: part number: CAPCERSMDCL2_0603-22UF,4V; tolerance: 20%
C31 C100 C103 = CAPCERSMDCL2: part number: CAPCERSMDCL2_0603-100NF,16V; tolerance: 10%
C32 C75 C86 = ELCAPTAN: part number: ELCAPTAN_SMD-150UF,20V
C33 C35-C37 C76 C78-C80 C87 C89-C91 = CAPCERSMDCL2: part number: CAPCERSMDCL2_1210-10UF,50V; tolerance: 10%
C34 C88 = CAPCERSMDCL2: part number: CAPCERSMDCL2_0603-XX,50V; tolerance: 10%
C38 C39 C81 C82 C92 C93 = CAPCERSMDCL2: part number: CAPCERSMDCL2_1210-47UF_X5R,6.3V; tolerance: 20%
C40 C83 C85 C94 = ELCAPTAN: part number: ELCAPTAN_SMD-220UF,6.3V
C41 C42 C46 C84 C95 = CAPCERSMDCL2: part number: CAPCERSMDCL2_0603-2.2UF,10V; tolerance: 10%
C43 C51-C55 C65 C67 C74 C98 C99 C104 C129 C135 = CAPCERSMDCL2: part number: CAPCERSMDCL2_0805-22UF,6.3V; tolerance: 15%
C44 = CAPCERSMDCL2: part number: CAPCERSMDCL2_0402-1NF_X7R,50V; tolerance: 10%
C47 = CAPCERSMDCL2: part number: CAPCERSMDCL2_0603-4.7UF,6.3V_GEN; tolerance: 10%
C48 C48_1 C52_1 C53_1 C54_1 = CAPCERSMDCL2: part number: CAPCERSMDCL2_0603-10UF,6.3V; tolerance: 20%
C96 C97 C115 C116 C126 C133 C136 C139 C142 = CAPCERSMDCL2: part number: CAPCERSMDCL2_1206-100UF_X5R,6.3V; tolerance: 20%
C117-C119 C127 C138 C145 C148 C151 C153 C155 C157 = CAPCERSMDCL2: part number: CAPCERSMDCL2_0402-4.7UF,4V; tolerance: 10%
C161 = CAPCERSMDCL1: part number: CAPCERSMDCL1_0603-220PF,50V; tolerance: 5%
C162 = CAPCERSMDCL1: part number: CAPCERSMDCL1_0603-56PF,50V; tolerance: 5%
C163-C165 = CAPCERSMDCL1: part number: CAPCERSMDCL1_0603-100PF,50V; tolerance: 5%
D1_1 = DIODE_CA: part number: DIODE_CA_SCHOTTKY-RB751V40T1
IC1 IC9 = AD5662: part number: AD5662BRMZ-1
IC2 IC3 = DS92001: part number: DS92001TMA
IC4 IC10 IC14 = LTM4606: part number: LTM4606EV#PBF
IC5-IC7 = DS90LV001: part number: DS90LV001TM
IC11 = CDCM61004: part number: CDCM61004RHB
IC13 = DS18B20: part number: DS18B20U+
IC15 = 24AA64: part number: 24AA64T-I/MC
IC16 = 74LVC1G06: part number: SN74LVC1G06DBVT
IC20 IC21 = LP3874_ADJ
IC22 = S25FL128S_RESET_VIO: part number: S25FL128SAGMFIR01
J1 = CON150P: part number: CON150P-QTS75_03FDA
J1_1 = CON6P: part number: CON6P-SSW-103-01-G-D
J2 = CONABC96: part number: CONABC96-09 03 196 6921
J3 = CONABC96: part number: CONABC96-09 73 296 6801
J3_1 J4_1 = CON3P: part number: CON3P-SIL254D
J4 J5 = SK_SATA: part number: SK_SATA_SMD_STR-MOLEX
J6 J7 = CON20P_SFP: part number: CON20P_SFP-1367073-1
J8 = CON14P: part number: CON14P-MOLEX_87831
J9 = CON2P: part number: CON2P-MSTBA2,5/2-G-5,08
J10 = CON12P: part number: CON12P-TSM-106-01-S-DV
L1-L4 L9 = FERRITE: part number: FERRITE_C0805-LI0805H121R-10,LI0805H121R-10
L5-L8 = FERRITE: part number: FERRITE_SMD-220Z,ILBB_0603
LC1-LC3 = BNX02: part number: BNX022-01
LD1 LD2 LD5 = LED: part number: LED-HSMH-C150
LD3 = LED: part number: LED-HSMY-C150
LD4 LD6 LD7 = LED: part number: LED-HSMG-C150
LK1_1 LK2_1 LK3_1 LK4_1 LK5_1 LK6_1 LK7_1 LK8_1 LK9_1 LK10_1 LK11_1 LK12_1 LK13_1 LK14_1 LK15_1 LK16_1 LK17_1 LK18_1 LK19_1 LK20_1 LK21_1 LK22_1 LK23_1 LK24_1 LK25_1 LK26_1 LK27_1 LK28_1 LK29_1 LK30_1 LK31_1 LK32_1 LK33_1 LK34_1 LK35_1 LK36_1 LK37_1 LK38_1 LK39_1 LK40_1 LK41_1 LK42_1 LK43_1 LK44_1 LK45_1 LK46_1 LK47_1 LK48_1 LK49_1 LK50_1 LK51_1 LK52_1 LK53_1 LK54_1 LK55_1 LK56_1 LK57_1 LK58_1 LK59_1 LK60_1 LK61_1 LK62_1 LK63_1 LK64_1 LK65_1 LK66_1 LK67_1 LK68_1 = 1-HOLE: part number: 1-HOLE_0-8-BASE
QZ1 = OSC_8P_OE_CLKP_CLKN_SDA_SCL: part number: 570CAC000121DG
QZ2 = OSC_6P_VCTRL_ENDIS_OUT: part number: OSC_6P_VCTRL_ENDIS_OUT_124-CFPV-45,20.000MHZ
R1 R2 R6 R14_1 R17_1 R24_1 = RSMD0402: part number: RSMD0402_1/16W-100,1%; tolerance: 1%
R1_1 R2_1 R4 R5 R18_1 R19_1 = RSMD0402: part number: RSMD0402_1/16W-51,1%; tolerance: 1%
R3 R25 R27 R29 R31 R33 R35 = RSMD0603: part number: RSMD0603_1/16W-2.4K,1%; tolerance: 1%
R3_1 R4_1 R5_1 R6_1 R7_1 R8_1 R9_1 R10_1 R11_1 R12_1 R13_1 R15_1 R16_1 = RSMD0402: part number: RSMD0402_1/16W-10R,5%; tolerance: 5%
R7 R48 R56-R60 R62 R67 = RSMD0603: part number: RSMD0603_1/10W-4.7K,1%; tolerance: 1%
R8 R9 R18 R19 R22-R24 R36 R37 R41 R42 = RSMD0603: part number: RSMD0603_1/10W-XX,1%; tolerance: 1%
R10 R38 R43 R72-R74 = RSMD0603: part number: RSMD0603_1/10W-100K,1%; tolerance: 1%
R11 = RSMD0603: part number: RSMD0603_1/16W-9K,1%; tolerance: 1%
R12 R40 R45 = RSMD0603: part number: RSMD0603_1/10W-390K,1%; tolerance: 1%
R13 = RSMD0402: part number: RSMD0402_1/16W-47K,1%; tolerance: 1%
R14-R16 = RSMD0603: part number: RSMD0603_1/10W-240,1%; tolerance: 1%
R17 = RSMD0603: part number: RSMD0603_1/10W-33,1%; tolerance: 1%
R20 R21 R54 R55 = RSMD0603: part number: RSMD0603_-00,
R20_1 R21_1 R22_1 R23_1 R25_1 R26_1 R28_1 R29_1 R30_1 R31_1 R32_1 R33_1 R34_1 R35_1 R36_1 R37_1 = RSMD0402: part number: RSMD0402_0.0625W-XX,1%; tolerance: 1%
R26 R28 R30 R32 R34 = RSMD0603: part number: RSMD0603_1/16W-1.2K,1%; tolerance: 1%
R27_1 = RSMD0402: part number: RSMD0402_1/16W-1K,5%; tolerance: 5%
R39 = RSMD0603: part number: RSMD0603_1/16W-40.2K,1%; tolerance: 1%
R42_1 = RSMD0603: part number: RSMD0603_1/10W-82,1%; tolerance: 1%
R44 = RSMD0603: part number: RSMD0603_1/10W-11K,1%; tolerance: 1%
R46 R47 R51 = RSMD0603: part number: RSMD0603_1/10W-120,1%; tolerance: 1%
R46_1 R47_1 = RSMD0402: part number: RSMD0402_1/16W-3.3R,5%; tolerance: 5%
R49 = RSMD0603: part number: RSMD0603_1/10W-51K,1%; tolerance: 1%
R50 = RSMD0603: part number: RSMD0603_1/10W-180,1%; tolerance: 1%
R52 R70 = RSMD0603: part number: RSMD0603_1/10W-150,1%; tolerance: 1%
R53 = RSMD0603: part number: RSMD0603_1/10W-51,1%; tolerance: 1%
R61 = RSMD0603: part number: RSMD0603_1/10W-330,1%; tolerance: 1%
R63 = RSMD0603: part number: RSMD0603_1/10W-2.4K,1%; tolerance: 1%
R64 R65 = RSMD0402: part number: RSMD0402_-00,
R66 = RSMD0603: part number: RSMD0603_1/10W-16K,1%; tolerance: 1%
R68 = RSMD0603: part number: RSMD0603_1/10W-33K,1%; tolerance: 1%
R69 = RSMD0603: part number: RSMD0603_1/10W-62K,1%; tolerance: 1%
R71 = RSMD0603: part number: RSMD0603_1/10W-3.3K,1%; tolerance: 1%
R75 R76 = RSMD0603: part number: RSMD0603_1/10W-100,1%; tolerance: 1%
R77 = RSMD0402: part number: RSMD0402_1/16W-33,1%; tolerance: 1%
REG1 = LT1585: part number: LT1585_TO263-3V3
REG3 = LT1585: part number: LT1585_TO263-ADJ
RG1 = LT3070: part number: LT3070EUFD#PBF
RG1_1 = LM2937IMP: part number: LM2937IMP_SOT223-2.5V,TI
RN1 RN2 RZ1 = R4ISMD: part number: R4ISMD_1206-150
RZ2 = R4ISMD: part number: R4ISMD_1206-4.7K
SFP1 SFP3 = SFP_CAGE: part number: SFP_CAGE-6367034-1
SFP2 SFP4 = SFP_CAGE: part number: SFP_CAGE-6367035-1
SW1 SW2 SW4 = SW_PUSHBUTTON_1SPSTA_4P: part number: SW_PUSHBUTTON_1SPSTA_4P_1-OMRON_B3SN-3012
SW3 = SW4INT: part number: SW4INT-1571983-4
U1 = OSC_VCXO_4P: part number: OSC_VCXO_4P_OSC_4PIN_53S-25MHZ,MERCURY
U1_1 = MAROC3: part number: MAROC3_PQFP-IN2P3
U2 = AD8031: part number: AD8031_SOT23-5-AD
U3 = PC049A_FPGA
Z1 = LM4040: part number: LM4040-CIM3-2.5V,0.5%

## Footprints (pads in the part's own frame, mm; a bottom-side part is the same pattern mirrored in y, then rotated)
1-HOLE_0-8P
  round 1.372 hole 0.813: 1(0,0)
ARC241_SO8
  rect 0.508x0.813 smd: 1(0,0) 2(0.8,0) 3(1.6,0) 4(2.4,0) 5(2.4,1.505) 6(1.6,1.505) 7(0.8,1.505) 8(0,1.505)
BGA484C100P22X22_2300X2300X260
  round 1 smd: (-12.35,-12.35) (12.35,12.35)
  round 0.5 smd: A1(-10.5,10.5) A2(-9.5,10.5) A3(-8.5,10.5) A4(-7.5,10.5) A5(-6.5,10.5) A6(-5.5,10.5) A7(-4.5,10.5) A8(-3.5,10.5) A9(-2.5,10.5) A10(-1.5,10.5) A11(-0.5,10.5) A12(0.5,10.5) A13(1.5,10.5) A14(2.5,10.5) A15(3.5,10.5) A16(4.5,10.5) A17(5.5,10.5) A18(6.5,10.5) A19(7.5,10.5) A20(8.5,10.5) A21(9.5,10.5) A22(10.5,10.5) AA1(-10.5,-9.5) AA2(-9.5,-9.5) AA3(-8.5,-9.5) AA4(-7.5,-9.5) AA5(-6.5,-9.5) AA6(-5.5,-9.5) AA7(-4.5,-9.5) AA8(-3.5,-9.5) AA9(-2.5,-9.5) AA10(-1.5,-9.5) AA11(-0.5,-9.5) AA12(0.5,-9.5) AA13(1.5,-9.5) AA14(2.5,-9.5) AA15(3.5,-9.5) AA16(4.5,-9.5) AA17(5.5,-9.5) AA18(6.5,-9.5) AA19(7.5,-9.5) AA20(8.5,-9.5) AA21(9.5,-9.5) AA22(10.5,-9.5) AB1(-10.5,-10.5) AB2(-9.5,-10.5) AB3(-8.5,-10.5) AB4(-7.5,-10.5) AB5(-6.5,-10.5) AB6(-5.5,-10.5) AB7(-4.5,-10.5) AB8(-3.5,-10.5) AB9(-2.5,-10.5) AB10(-1.5,-10.5) AB11(-0.5,-10.5) AB12(0.5,-10.5) AB13(1.5,-10.5) AB14(2.5,-10.5) AB15(3.5,-10.5) AB16(4.5,-10.5) AB17(5.5,-10.5) AB18(6.5,-10.5) AB19(7.5,-10.5) AB20(8.5,-10.5) AB21(9.5,-10.5) AB22(10.5,-10.5) B1(-10.5,9.5) B2(-9.5,9.5) B3(-8.5,9.5) B4(-7.5,9.5) B5(-6.5,9.5) B6(-5.5,9.5) B7(-4.5,9.5) B8(-3.5,9.5) B9(-2.5,9.5) B10(-1.5,9.5) B11(-0.5,9.5) B12(0.5,9.5) B13(1.5,9.5) B14(2.5,9.5) B15(3.5,9.5) B16(4.5,9.5) B17(5.5,9.5) B18(6.5,9.5) B19(7.5,9.5) B20(8.5,9.5) B21(9.5,9.5) B22(10.5,9.5) C1(-10.5,8.5) C2(-9.5,8.5) C3(-8.5,8.5) C4(-7.5,8.5) C5(-6.5,8.5) C6(-5.5,8.5) C7(-4.5,8.5) C8(-3.5,8.5) C9(-2.5,8.5) C10(-1.5,8.5) C11(-0.5,8.5) C12(0.5,8.5) C13(1.5,8.5) C14(2.5,8.5) C15(3.5,8.5) C16(4.5,8.5) C17(5.5,8.5) C18(6.5,8.5) C19(7.5,8.5) C20(8.5,8.5) C21(9.5,8.5) C22(10.5,8.5) D1(-10.5,7.5) D2(-9.5,7.5) D3(-8.5,7.5) D4(-7.5,7.5) D5(-6.5,7.5) D6(-5.5,7.5) D7(-4.5,7.5) D8(-3.5,7.5) D9(-2.5,7.5) D10(-1.5,7.5) D11(-0.5,7.5) D12(0.5,7.5) D13(1.5,7.5) D14(2.5,7.5) D15(3.5,7.5) D16(4.5,7.5) D17(5.5,7.5) D18(6.5,7.5) D19(7.5,7.5) D20(8.5,7.5) D21(9.5,7.5) D22(10.5,7.5) E1(-10.5,6.5) E2(-9.5,6.5) E3(-8.5,6.5) E4(-7.5,6.5) E5(-6.5,6.5) E6(-5.5,6.5) E7(-4.5,6.5) E8(-3.5,6.5) E9(-2.5,6.5) E10(-1.5,6.5) E11(-0.5,6.5) E12(0.5,6.5) E13(1.5,6.5) E14(2.5,6.5) E15(3.5,6.5) E16(4.5,6.5) E17(5.5,6.5) E18(6.5,6.5) E19(7.5,6.5) E20(8.5,6.5) E21(9.5,6.5) E22(10.5,6.5) F1(-10.5,5.5) F2(-9.5,5.5) F3(-8.5,5.5) F4(-7.5,5.5) F5(-6.5,5.5) F6(-5.5,5.5) F7(-4.5,5.5) F8(-3.5,5.5) F9(-2.5,5.5) F10(-1.5,5.5) F11(-0.5,5.5) F12(0.5,5.5) F13(1.5,5.5) F14(2.5,5.5) F15(3.5,5.5) F16(4.5,5.5) F17(5.5,5.5) F18(6.5,5.5) F19(7.5,5.5) F20(8.5,5.5) F21(9.5,5.5) F22(10.5,5.5) G1(-10.5,4.5) G2(-9.5,4.5) G3(-8.5,4.5) G4(-7.5,4.5) G5(-6.5,4.5) G6(-5.5,4.5) G7(-4.5,4.5) G8(-3.5,4.5) G9(-2.5,4.5) G10(-1.5,4.5) G11(-0.5,4.5) G12(0.5,4.5) G13(1.5,4.5) G14(2.5,4.5) G15(3.5,4.5) G16(4.5,4.5) G17(5.5,4.5) G18(6.5,4.5) G19(7.5,4.5) G20(8.5,4.5) G21(9.5,4.5) G22(10.5,4.5) H1(-10.5,3.5) H2(-9.5,3.5) H3(-8.5,3.5) H4(-7.5,3.5) H5(-6.5,3.5) H6(-5.5,3.5) H7(-4.5,3.5) H8(-3.5,3.5) H9(-2.5,3.5) H10(-1.5,3.5) H11(-0.5,3.5) H12(0.5,3.5) H13(1.5,3.5) H14(2.5,3.5) H15(3.5,3.5) H16(4.5,3.5) H17(5.5,3.5) H18(6.5,3.5) H19(7.5,3.5) H20(8.5,3.5) H21(9.5,3.5) H22(10.5,3.5) J1(-10.5,2.5) J2(-9.5,2.5) J3(-8.5,2.5) J4(-7.5,2.5) J5(-6.5,2.5) J6(-5.5,2.5) J7(-4.5,2.5) J8(-3.5,2.5) J9(-2.5,2.5) J10(-1.5,2.5) J11(-0.5,2.5) J12(0.5,2.5) J13(1.5,2.5) J14(2.5,2.5) J15(3.5,2.5) J16(4.5,2.5) J17(5.5,2.5) J18(6.5,2.5) J19(7.5,2.5) J20(8.5,2.5) J21(9.5,2.5) J22(10.5,2.5) K1(-10.5,1.5) K2(-9.5,1.5) K3(-8.5,1.5) K4(-7.5,1.5) K5(-6.5,1.5) K6(-5.5,1.5) K7(-4.5,1.5) K8(-3.5,1.5) K9(-2.5,1.5) K10(-1.5,1.5) K11(-0.5,1.5) K12(0.5,1.5) K13(1.5,1.5) K14(2.5,1.5) K15(3.5,1.5) K16(4.5,1.5) K17(5.5,1.5) K18(6.5,1.5) K19(7.5,1.5) K20(8.5,1.5) K21(9.5,1.5) K22(10.5,1.5) L1(-10.5,0.5) L2(-9.5,0.5) L3(-8.5,0.5) L4(-7.5,0.5) L5(-6.5,0.5) L6(-5.5,0.5) L7(-4.5,0.5) L8(-3.5,0.5) L9(-2.5,0.5) L10(-1.5,0.5) L11(-0.5,0.5) L12(0.5,0.5) L13(1.5,0.5) L14(2.5,0.5) L15(3.5,0.5) L16(4.5,0.5) L17(5.5,0.5) L18(6.5,0.5) L19(7.5,0.5) L20(8.5,0.5) L21(9.5,0.5) L22(10.5,0.5) M1(-10.5,-0.5) M2(-9.5,-0.5) M3(-8.5,-0.5) M4(-7.5,-0.5) M5(-6.5,-0.5) M6(-5.5,-0.5) M7(-4.5,-0.5) M8(-3.5,-0.5) M9(-2.5,-0.5) M10(-1.5,-0.5) M11(-0.5,-0.5) M12(0.5,-0.5) M13(1.5,-0.5) M14(2.5,-0.5) M15(3.5,-0.5) M16(4.5,-0.5) M17(5.5,-0.5) M18(6.5,-0.5) M19(7.5,-0.5) M20(8.5,-0.5) M21(9.5,-0.5) M22(10.5,-0.5) N1(-10.5,-1.5) N2(-9.5,-1.5) N3(-8.5,-1.5) N4(-7.5,-1.5) N5(-6.5,-1.5) N6(-5.5,-1.5) N7(-4.5,-1.5) N8(-3.5,-1.5) N9(-2.5,-1.5) N10(-1.5,-1.5) N11(-0.5,-1.5) N12(0.5,-1.5) N13(1.5,-1.5) N14(2.5,-1.5) N15(3.5,-1.5) N16(4.5,-1.5) N17(5.5,-1.5) N18(6.5,-1.5) N19(7.5,-1.5) N20(8.5,-1.5) N21(9.5,-1.5) N22(10.5,-1.5) P1(-10.5,-2.5) P2(-9.5,-2.5) P3(-8.5,-2.5) P4(-7.5,-2.5) P5(-6.5,-2.5) P6(-5.5,-2.5) P7(-4.5,-2.5) P8(-3.5,-2.5) P9(-2.5,-2.5) P10(-1.5,-2.5) P11(-0.5,-2.5) P12(0.5,-2.5) P13(1.5,-2.5) P14(2.5,-2.5) P15(3.5,-2.5) P16(4.5,-2.5) P17(5.5,-2.5) P18(6.5,-2.5) P19(7.5,-2.5) P20(8.5,-2.5) P21(9.5,-2.5) P22(10.5,-2.5) R1(-10.5,-3.5) R2(-9.5,-3.5) R3(-8.5,-3.5) R4(-7.5,-3.5) R5(-6.5,-3.5) R6(-5.5,-3.5) R7(-4.5,-3.5) R8(-3.5,-3.5) R9(-2.5,-3.5) R10(-1.5,-3.5) R11(-0.5,-3.5) R12(0.5,-3.5) R13(1.5,-3.5) R14(2.5,-3.5) R15(3.5,-3.5) R16(4.5,-3.5) R17(5.5,-3.5) R18(6.5,-3.5) R19(7.5,-3.5) R20(8.5,-3.5) R21(9.5,-3.5) R22(10.5,-3.5) T1(-10.5,-4.5) T2(-9.5,-4.5) T3(-8.5,-4.5) T4(-7.5,-4.5) T5(-6.5,-4.5) T6(-5.5,-4.5) T7(-4.5,-4.5) T8(-3.5,-4.5) T9(-2.5,-4.5) T10(-1.5,-4.5) T11(-0.5,-4.5) T12(0.5,-4.5) T13(1.5,-4.5) T14(2.5,-4.5) T15(3.5,-4.5) T16(4.5,-4.5) T17(5.5,-4.5) T18(6.5,-4.5) T19(7.5,-4.5) T20(8.5,-4.5) T21(9.5,-4.5) T22(10.5,-4.5) U1(-10.5,-5.5) U2(-9.5,-5.5) U3(-8.5,-5.5) U4(-7.5,-5.5) U5(-6.5,-5.5) U6(-5.5,-5.5) U7(-4.5,-5.5) U8(-3.5,-5.5) U9(-2.5,-5.5) U10(-1.5,-5.5) U11(-0.5,-5.5) U12(0.5,-5.5) U13(1.5,-5.5) U14(2.5,-5.5) U15(3.5,-5.5) U16(4.5,-5.5) U17(5.5,-5.5) U18(6.5,-5.5) U19(7.5,-5.5) U20(8.5,-5.5) U21(9.5,-5.5) U22(10.5,-5.5) V1(-10.5,-6.5) V2(-9.5,-6.5) V3(-8.5,-6.5) V4(-7.5,-6.5) V5(-6.5,-6.5) V6(-5.5,-6.5) V7(-4.5,-6.5) V8(-3.5,-6.5) V9(-2.5,-6.5) V10(-1.5,-6.5) V11(-0.5,-6.5) V12(0.5,-6.5) V13(1.5,-6.5) V14(2.5,-6.5) V15(3.5,-6.5) V16(4.5,-6.5) V17(5.5,-6.5) V18(6.5,-6.5) V19(7.5,-6.5) V20(8.5,-6.5) V21(9.5,-6.5) V22(10.5,-6.5) W1(-10.5,-7.5) W2(-9.5,-7.5) W3(-8.5,-7.5) W4(-7.5,-7.5) W5(-6.5,-7.5) W6(-5.5,-7.5) W7(-4.5,-7.5) W8(-3.5,-7.5) W9(-2.5,-7.5) W10(-1.5,-7.5) W11(-0.5,-7.5) W12(0.5,-7.5) W13(1.5,-7.5) W14(2.5,-7.5) W15(3.5,-7.5) W16(4.5,-7.5) W17(5.5,-7.5) W18(6.5,-7.5) W19(7.5,-7.5) W20(8.5,-7.5) W21(9.5,-7.5) W22(10.5,-7.5) Y1(-10.5,-8.5) Y2(-9.5,-8.5) Y3(-8.5,-8.5) Y4(-7.5,-8.5) Y5(-6.5,-8.5) Y6(-5.5,-8.5) Y7(-4.5,-8.5) Y8(-3.5,-8.5) Y9(-2.5,-8.5) Y10(-1.5,-8.5) Y11(-0.5,-8.5) Y12(0.5,-8.5) Y13(1.5,-8.5) Y14(2.5,-8.5) Y15(3.5,-8.5) Y16(4.5,-8.5) Y17(5.5,-8.5) Y18(6.5,-8.5) Y19(7.5,-8.5) Y20(8.5,-8.5) Y21(9.5,-8.5) Y22(10.5,-8.5)
C0402
  rect 0.6x0.6 smd: 1(-0.45,0) 2(0.45,0)
C0603
  rect 0.9x1 smd: 1(-0.75,0) 2(0.75,0)
C0805
  rect 1.2x1.4 smd: 1(-0.9,0) 2(0.9,0)
C1206
  rect 1.3x1.8 smd: 1(-1.5,0) 2(1.5,0)
C1210
  rect 1.2x2.7 smd: 1(-1.5,0) 2(1.5,0)
C7343POL
  rect 2.032x3.175 smd: 1(0,0) 2(6,0)
CAPC3225X279N
  rect 1.15x2.7 smd: 1(-1.5,0) 2(1.5,0)
CON2MC_508
  round 2.032 hole 1.499: 1(0,0) 2(0,-5.08)
CON14MD_2MM
  round 1.524 hole 0.914: 1(0,0) 2(2,0) 3(0,-2) 4(2,-2) 5(0,-4) 6(2,-4) 7(0,-6) 8(2,-6) 9(0,-8) 10(2,-8) 11(0,-10) 12(2,-10) 13(0,-12) 14(2,-12)
CON150_QTSDA
  round 1.6 hole 1.016: (-1.054,-56.861) (-1.054,1.622)
  rect 1.448x0.406 smd: 1(0,0) 2(-6.17,0) 3(0,-0.635) 4(-6.17,-0.635) 5(0,-1.27) 6(-6.17,-1.27) 7(0,-1.905) 8(-6.17,-1.905) 9(0,-2.54) 10(-6.17,-2.54) 11(0,-3.175) 12(-6.17,-3.175) 13(0,-3.81) 14(-6.17,-3.81) 15(0,-4.445) 16(-6.17,-4.445) 17(0,-5.08) 18(-6.17,-5.08) 19(0,-5.715) 20(-6.17,-5.715) 21(0,-6.35) 22(-6.17,-6.35) 23(0,-6.985) 24(-6.17,-6.985) 25(0,-7.62) 26(-6.17,-7.62) 27(0,-8.255) 28(-6.17,-8.255) 29(0,-8.89) 30(-6.17,-8.89) 31(0,-9.525) 32(-6.17,-9.525) 33(0,-10.16) 34(-6.17,-10.16) 35(0,-10.795) 36(-6.17,-10.795) 37(0,-11.43) 38(-6.17,-11.43) 39(0,-12.065) 40(-6.17,-12.065) 41(0,-12.7) 42(-6.17,-12.7) 43(0,-13.335) 44(-6.17,-13.335) 45(0,-13.97) 46(-6.17,-13.97) 47(0,-14.605) 48(-6.17,-14.605) 49(0,-15.24) 50(-6.17,-15.24) 51(0,-20) 52(-6.17,-20) 53(0,-20.635) 54(-6.17,-20.635) 55(0,-21.27) 56(-6.17,-21.27) 57(0,-21.905) 58(-6.17,-21.905) 59(0,-22.54) 60(-6.17,-22.54) 61(0,-23.175) 62(-6.17,-23.175) 63(0,-23.81) 64(-6.17,-23.81) 65(0,-24.445) 66(-6.17,-24.445) 67(0,-25.08) 68(-6.17,-25.08) 69(0,-25.715) 70(-6.17,-25.715) 71(0,-26.35) 72(-6.17,-26.35) 73(0,-26.985) 74(-6.17,-26.985) 75(0,-27.62) 76(-6.17,-27.62) 77(0,-28.255) 78(-6.17,-28.255) 79(0,-28.89) 80(-6.17,-28.89) 81(0,-29.525) 82(-6.17,-29.525) 83(0,-30.16) 84(-6.17,-30.16) 85(0,-30.795) 86(-6.17,-30.795) 87(0,-31.43) 88(-6.17,-31.43) 89(0,-32.065) 90(-6.17,-32.065) 91(0,-32.7) 92(-6.17,-32.7) 93(0,-33.335) 94(-6.17,-33.335) 95(0,-33.97) 96(-6.17,-33.97) 97(0,-34.605) 98(-6.17,-34.605) 99(0,-35.24) 100(-6.17,-35.24) 101(0,-40) 102(-6.17,-40) 103(0,-40.635) 104(-6.17,-40.635) 105(0,-41.27) 106(-6.17,-41.27) 107(0,-41.905) 108(-6.17,-41.905) 109(0,-42.54) 110(-6.17,-42.54) 111(0,-43.175) 112(-6.17,-43.175) 113(0,-43.81) 114(-6.17,-43.81) 115(0,-44.445) 116(-6.17,-44.445) 117(0,-45.08) 118(-6.17,-45.08) 119(0,-45.715) 120(-6.17,-45.715) 121(0,-46.35) 122(-6.17,-46.35) 123(0,-46.985) 124(-6.17,-46.985) 125(0,-47.62) 126(-6.17,-47.62) 127(0,-48.255) 128(-6.17,-48.255) 129(0,-48.89) 130(-6.17,-48.89) 131(0,-49.525) 132(-6.17,-49.525) 133(0,-50.16) 134(-6.17,-50.16) 135(0,-50.795) 136(-6.17,-50.795) 137(0,-51.43) 138(-6.17,-51.43) 139(0,-52.065) 140(-6.17,-52.065) 141(0,-52.7) 142(-6.17,-52.7) 143(0,-53.335) 144(-6.17,-53.335) 145(0,-53.97) 146(-6.17,-53.97) 147(0,-54.605) 148(-6.17,-54.605) 149(0,-55.24) 150(-6.17,-55.24)
  rect 0.635x2.54 smd: 151(-3.086,0.826) 154(-3.086,-16.066) 155(-3.086,-19.174) 158(-3.086,-36.066) 159(-3.086,-39.174) 162(-3.086,-56.066)
  rect 0.635x4.699 smd: 152(-3.086,-4.445) 153(-3.086,-10.795) 156(-3.086,-24.445) 157(-3.086,-30.795) 160(-3.086,-44.445) 161(-3.086,-50.795)
CONHE13D3X1M
  round 1.524 hole 0.914: 1(0,0) 2(2.54,0) 3(5.08,0)
D1206
  rect 1.016x1.778 smd: 1(0,0) 2(3.2,0)
HARTING_0903196X921
  round 5 hole 2.8: 1(2.54,5.08) 2(2.54,-83.82)
  round 1.7 hole 1: A1(0,0) A2(0,-2.54) A3(0,-5.08) A4(0,-7.62) A5(0,-10.16) A6(0,-12.7) A7(0,-15.24) A8(0,-17.78) A9(0,-20.32) A10(0,-22.86) A11(0,-25.4) A12(0,-27.94) A13(0,-30.48) A14(0,-33.02) A15(0,-35.56) A16(0,-38.1) A17(0,-40.64) A18(0,-43.18) A19(0,-45.72) A20(0,-48.26) A21(0,-50.8) A22(0,-53.34) A23(0,-55.88) A24(0,-58.42) A25(0,-60.96) A26(0,-63.5) A27(0,-66.04) A28(0,-68.58) A29(0,-71.12) A30(0,-73.66) A31(0,-76.2) A32(0,-78.74) B1(-2.54,0) B2(-2.54,-2.54) B3(-2.54,-5.08) B4(-2.54,-7.62) B5(-2.54,-10.16) B6(-2.54,-12.7) B7(-2.54,-15.24) B8(-2.54,-17.78) B9(-2.54,-20.32) B10(-2.54,-22.86) B11(-2.54,-25.4) B12(-2.54,-27.94) B13(-2.54,-30.48) B14(-2.54,-33.02) B15(-2.54,-35.56) B16(-2.54,-38.1) B17(-2.54,-40.64) B18(-2.54,-43.18) B19(-2.54,-45.72) B20(-2.54,-48.26) B21(-2.54,-50.8) B22(-2.54,-53.34) B23(-2.54,-55.88) B24(-2.54,-58.42) B25(-2.54,-60.96) B26(-2.54,-63.5) B27(-2.54,-66.04) B28(-2.54,-68.58) B29(-2.54,-71.12) B30(-2.54,-73.66) B31(-2.54,-76.2) B32(-2.54,-78.74) C1(-5.08,0) C2(-5.08,-2.54) C3(-5.08,-5.08) C4(-5.08,-7.62) C5(-5.08,-10.16) C6(-5.08,-12.7) C7(-5.08,-15.24) C8(-5.08,-17.78) C9(-5.08,-20.32) C10(-5.08,-22.86) C11(-5.08,-25.4) C12(-5.08,-27.94) C13(-5.08,-30.48) C14(-5.08,-33.02) C15(-5.08,-35.56) C16(-5.08,-38.1) C17(-5.08,-40.64) C18(-5.08,-43.18) C19(-5.08,-45.72) C20(-5.08,-48.26) C21(-5.08,-50.8) C22(-5.08,-53.34) C23(-5.08,-55.88) C24(-5.08,-58.42) C25(-5.08,-60.96) C26(-5.08,-63.5) C27(-5.08,-66.04) C28(-5.08,-68.58) C29(-5.08,-71.12) C30(-5.08,-73.66) C31(-5.08,-76.2) C32(-5.08,-78.74)
HARTING_09732966801
  round 5 hole 2.8: 1(2.54,5.08) 2(2.54,-83.82)
  round 1.7 hole 1: A1(0,0) A2(0,-2.54) A3(0,-5.08) A4(0,-7.62) A5(0,-10.16) A6(0,-12.7) A7(0,-15.24) A8(0,-17.78) A9(0,-20.32) A10(0,-22.86) A11(0,-25.4) A12(0,-27.94) A13(0,-30.48) A14(0,-33.02) A15(0,-35.56) A16(0,-38.1) A17(0,-40.64) A18(0,-43.18) A19(0,-45.72) A20(0,-48.26) A21(0,-50.8) A22(0,-53.34) A23(0,-55.88) A24(0,-58.42) A25(0,-60.96) A26(0,-63.5) A27(0,-66.04) A28(0,-68.58) A29(0,-71.12) A30(0,-73.66) A31(0,-76.2) A32(0,-78.74) B1(-2.54,0) B2(-2.54,-2.54) B3(-2.54,-5.08) B4(-2.54,-7.62) B5(-2.54,-10.16) B6(-2.54,-12.7) B7(-2.54,-15.24) B8(-2.54,-17.78) B9(-2.54,-20.32) B10(-2.54,-22.86) B11(-2.54,-25.4) B12(-2.54,-27.94) B13(-2.54,-30.48) B14(-2.54,-33.02) B15(-2.54,-35.56) B16(-2.54,-38.1) B17(-2.54,-40.64) B18(-2.54,-43.18) B19(-2.54,-45.72) B20(-2.54,-48.26) B21(-2.54,-50.8) B22(-2.54,-53.34) B23(-2.54,-55.88) B24(-2.54,-58.42) B25(-2.54,-60.96) B26(-2.54,-63.5) B27(-2.54,-66.04) B28(-2.54,-68.58) B29(-2.54,-71.12) B30(-2.54,-73.66) B31(-2.54,-76.2) B32(-2.54,-78.74) C1(-5.08,0) C2(-5.08,-2.54) C3(-5.08,-5.08) C4(-5.08,-7.62) C5(-5.08,-10.16) C6(-5.08,-12.7) C7(-5.08,-15.24) C8(-5.08,-17.78) C9(-5.08,-20.32) C10(-5.08,-22.86) C11(-5.08,-25.4) C12(-5.08,-27.94) C13(-5.08,-30.48) C14(-5.08,-33.02) C15(-5.08,-35.56) C16(-5.08,-38.1) C17(-5.08,-40.64) C18(-5.08,-43.18) C19(-5.08,-45.72) C20(-5.08,-48.26) C21(-5.08,-50.8) C22(-5.08,-53.34) C23(-5.08,-55.88) C24(-5.08,-58.42) C25(-5.08,-60.96) C26(-5.08,-63.5) C27(-5.08,-66.04) C28(-5.08,-68.58) C29(-5.08,-71.12) C30(-5.08,-73.66) C31(-5.08,-76.2) C32(-5.08,-78.74)
INDC2012X90N
  rect 1.1x1.45 smd: 1(-0.9,0) 2(0.9,0)
LGA133S127P12X12_05-08-1766
  rect 0.65x0.65 smd: A1(-6.985,6.985) A2(-5.715,6.985) A3(-4.445,6.985) A4(-3.175,6.985) A5(-1.905,6.985) A6(-0.635,6.985) A7(0.635,6.985) A8(1.905,6.985) A9(3.175,6.985) A10(4.445,6.985) A11(5.715,6.985) A12(6.985,6.985) B1(-6.985,5.715) B2(-5.715,5.715) B3(-4.445,5.715) B4(-3.175,5.715) B5(-1.905,5.715) B6(-0.635,5.715) B7(0.635,5.715) B9(3.175,5.715) B11(5.715,5.715) B12(6.985,5.715) C1(-6.985,4.445) C2(-5.715,4.445) C3(-4.445,4.445) C4(-3.175,4.445) C5(-1.905,4.445) C6(-0.635,4.445) C7(0.635,4.445) C10(4.445,4.445) C11(5.715,4.445) C12(6.985,4.445) D1(-6.985,3.175) D2(-5.715,3.175) D3(-4.445,3.175) D4(-3.175,3.175) D5(-1.905,3.175) D6(-0.635,3.175) D9(3.175,3.175) D11(5.715,3.175) D12(6.985,3.175) E1(-6.985,1.905) E2(-5.715,1.905) E3(-4.445,1.905) E4(-3.175,1.905) E5(-1.905,1.905) E6(-0.635,1.905) E7(0.635,1.905) E8(1.905,1.905) E11(5.715,1.905) E12(6.985,1.905) F1(-6.985,0.635) F2(-5.715,0.635) F3(-4.445,0.635) F4(-3.175,0.635) F5(-1.905,0.635) F6(-0.635,0.635) F7(0.635,0.635) F8(1.905,0.635) F9(3.175,0.635) F12(6.985,0.635) G1(-6.985,-0.635) G2(-5.715,-0.635) G3(-4.445,-0.635) G4(-3.175,-0.635) G5(-1.905,-0.635) G6(-0.635,-0.635) G7(0.635,-0.635) G8(1.905,-0.635) G9(3.175,-0.635) G10(4.445,-0.635) G11(5.715,-0.635) G12(6.985,-0.635) H1(-6.985,-1.905) H2(-5.715,-1.905) H3(-4.445,-1.905) H4(-3.175,-1.905) H5(-1.905,-1.905) H6(-0.635,-1.905) H7(0.635,-1.905) H8(1.905,-1.905) H9(3.175,-1.905) H10(4.445,-1.905) H11(5.715,-1.905) H12(6.985,-1.905) J1(-6.985,-3.175) J2(-5.715,-3.175) J3(-4.445,-3.175) J4(-3.175,-3.175) J5(-1.905,-3.175) J6(-0.635,-3.175) J7(0.635,-3.175) J8(1.905,-3.175) J9(3.175,-3.175) J10(4.445,-3.175) J11(5.715,-3.175) J12(6.985,-3.175) K1(-6.985,-4.445) K2(-5.715,-4.445) K3(-4.445,-4.445) K4(-3.175,-4.445) K5(-1.905,-4.445) K6(-0.635,-4.445) K7(0.635,-4.445) K8(1.905,-4.445) K9(3.175,-4.445) K10(4.445,-4.445) K11(5.715,-4.445) K12(6.985,-4.445) L1(-6.985,-5.715) L2(-5.715,-5.715) L3(-4.445,-5.715) L4(-3.175,-5.715) L5(-1.905,-5.715) L6(-0.635,-5.715) L7(0.635,-5.715) L8(1.905,-5.715) L9(3.175,-5.715) L10(4.445,-5.715) L11(5.715,-5.715) L12(6.985,-5.715) M1(-6.985,-6.985) M2(-5.715,-6.985) M3(-4.445,-6.985) M4(-3.175,-6.985) M5(-1.905,-6.985) M6(-0.635,-6.985) M7(0.635,-6.985) M8(1.905,-6.985) M9(3.175,-6.985) M10(4.445,-6.985) M11(5.715,-6.985) M12(6.985,-6.985)
MURATA_BNX02
  rect 2.5x2.5 smd: 1(-6.2,2.1) 2(6.2,2.1) 3(-6.2,-2.2) 4(6.2,-2.2)
  rect 3.4x1.4 smd: 5(3.25,4.5)
  rect 7.9x1.4 smd: 6(1,-4.5)
OMRON_B3SN-3012
  rect 2.8x1.4 smd: 1(3.4,-2) 2(-3.4,-2) 3(3.4,2) 4(-3.4,2)
OSC_4PIN_53S
  rect 1x1.2 smd: 1(-1.15,1.85) 2(-1.15,-1.85) 3(1.15,-1.85) 4(1.15,1.85)
OSC_SILABS_SI570
  rect 1.7x2.15 smd: 1(-2.54,-2.1) 2(0,-2.1) 3(2.54,-2.1) 4(2.54,2.1) 5(0,2.1) 6(-2.54,2.1)
  rect 1.55x1.3 smd: 7(2.852,0) 8(-2.853,0)
OSCSC254P490X696X180-6N
  rect 1.8x1.55 smd: 1(-2.15,2.54) 2(-2.15,0) 3(-2.15,-2.54) 4(2.15,-2.54) 5(2.15,0) 6(2.15,2.54)
POSCAP_D3
  rect 2.438x2.921 smd: 1(0,0) 2(6.1,0)
PQFP240_050
  rect 2.413x0.254 smd: 1(0,0) 2(0,-0.5) 3(0,-1) 4(0,-1.5) 5(0,-2) 6(0,-2.5) 7(0,-3) 8(0,-3.5) 9(0,-4) 10(0,-4.5) 11(0,-5) 12(0,-5.5) 13(0,-6) 14(0,-6.5) 15(0,-7) 16(0,-7.5) 17(0,-8) 18(0,-8.5) 19(0,-9) 20(0,-9.5) 21(0,-10) 22(0,-10.5) 23(0,-11) 24(0,-11.5) 25(0,-12) 26(0,-12.5) 27(0,-13) 28(0,-13.5) 29(0,-14) 30(0,-14.5) 31(0,-15) 32(0,-15.5) 33(0,-16) 34(0,-16.5) 35(0,-17) 36(0,-17.5) 37(0,-18) 38(0,-18.5) 39(0,-19) 40(0,-19.5) 41(0,-20) 42(0,-20.5) 43(0,-21) 44(0,-21.5) 45(0,-22) 46(0,-22.5) 47(0,-23) 48(0,-23.5) 49(0,-24) 50(0,-24.5) 51(0,-25) 52(0,-25.5) 53(0,-26) 54(0,-26.5) 55(0,-27) 56(0,-27.5) 57(0,-28) 58(0,-28.5) 59(0,-29) 60(0,-29.5) 121(33.987,-29.5) 122(33.987,-29) 123(33.987,-28.5) 124(33.987,-28) 125(33.987,-27.5) 126(33.987,-27) 127(33.987,-26.5) 128(33.987,-26) 129(33.987,-25.5) 130(33.987,-25) 131(33.987,-24.5) 132(33.987,-24) 133(33.987,-23.5) 134(33.987,-23) 135(33.987,-22.5) 136(33.987,-22) 137(33.987,-21.5) 138(33.987,-21) 139(33.987,-20.5) 140(33.987,-20) 141(33.987,-19.5) 142(33.987,-19) 143(33.987,-18.5) 144(33.987,-18) 145(33.987,-17.5) 146(33.987,-17) 147(33.987,-16.5) 148(33.987,-16) 149(33.987,-15.5) 150(33.987,-15) 151(33.987,-14.5) 152(33.987,-14) 153(33.987,-13.5) 154(33.987,-13) 155(33.987,-12.5) 156(33.987,-12) 157(33.987,-11.5) 158(33.987,-11) 159(33.987,-10.5) 160(33.987,-10) 161(33.987,-9.5) 162(33.987,-9) 163(33.987,-8.5) 164(33.987,-8) 165(33.987,-7.5) 166(33.987,-7) 167(33.987,-6.5) 168(33.987,-6) 169(33.987,-5.5) 170(33.987,-5) 171(33.987,-4.5) 172(33.987,-4) 173(33.987,-3.5) 174(33.987,-3) 175(33.987,-2.5) 176(33.987,-2) 177(33.987,-1.5) 178(33.987,-1) 179(33.987,-0.5) 180(33.987,0)
  rect 0.254x2.413 smd: 61(2.244,-31.744) 62(2.744,-31.744) 63(3.244,-31.744) 64(3.744,-31.744) 65(4.244,-31.744) 66(4.744,-31.744) 67(5.244,-31.744) 68(5.744,-31.744) 69(6.244,-31.744) 70(6.744,-31.744) 71(7.244,-31.744) 72(7.744,-31.744) 73(8.243,-31.744) 74(8.743,-31.744) 75(9.243,-31.744) 76(9.743,-31.744) 77(10.243,-31.744) 78(10.743,-31.744) 79(11.243,-31.744) 80(11.743,-31.744) 81(12.243,-31.744) 82(12.743,-31.744) 83(13.243,-31.744) 84(13.743,-31.744) 85(14.243,-31.744) 86(14.743,-31.744) 87(15.243,-31.744) 88(15.743,-31.744) 89(16.244,-31.744) 90(16.744,-31.744) 91(17.244,-31.744) 92(17.744,-31.744) 93(18.244,-31.744) 94(18.744,-31.744) 95(19.244,-31.744) 96(19.744,-31.744) 97(20.244,-31.744) 98(20.744,-31.744) 99(21.244,-31.744) 100(21.744,-31.744) 101(22.244,-31.744) 102(22.744,-31.744) 103(23.244,-31.744) 104(23.744,-31.744) 105(24.244,-31.744) 106(24.744,-31.744) 107(25.244,-31.744) 108(25.744,-31.744) 109(26.244,-31.744) 110(26.744,-31.744) 111(27.244,-31.744) 112(27.744,-31.744) 113(28.244,-31.744) 114(28.744,-31.744) 115(29.244,-31.744) 116(29.744,-31.744) 117(30.244,-31.744) 118(30.744,-31.744) 119(31.244,-31.744) 120(31.744,-31.744) 181(31.744,2.244) 182(31.244,2.244) 183(30.744,2.244) 184(30.244,2.244) 185(29.744,2.244) 186(29.244,2.244) 187(28.744,2.244) 188(28.244,2.244) 189(27.744,2.244) 190(27.244,2.244) 191(26.744,2.244) 192(26.244,2.244) 193(25.744,2.244) 194(25.244,2.244) 195(24.744,2.244) 196(24.244,2.244) 197(23.744,2.244) 198(23.244,2.244) 199(22.744,2.244) 200(22.244,2.244) 201(21.744,2.244) 202(21.244,2.244) 203(20.744,2.244) 204(20.244,2.244) 205(19.744,2.244) 206(19.244,2.244) 207(18.744,2.244) 208(18.244,2.244) 209(17.744,2.244) 210(17.244,2.244) 211(16.744,2.244) 212(16.244,2.244) 213(15.743,2.244) 214(15.243,2.244) 215(14.743,2.244) 216(14.243,2.244) 217(13.743,2.244) 218(13.243,2.244) 219(12.743,2.244) 220(12.243,2.244) 221(11.743,2.244) 222(11.243,2.244) 223(10.743,2.244) 224(10.243,2.244) 225(9.743,2.244) 226(9.243,2.244) 227(8.743,2.244) 228(8.243,2.244) 229(7.744,2.244) 230(7.244,2.244) 231(6.744,2.244) 232(6.244,2.244) 233(5.744,2.244) 234(5.244,2.244) 235(4.744,2.244) 236(4.244,2.244) 237(3.744,2.244) 238(3.244,2.244) 239(2.744,2.244) 240(2.244,2.244)
